# Altium PCB Mjollnir Prototype.PcbDoc (part 1 of 2)
Units mm, origin at the board's own origin, x right, y up, seen from the top; angles counter-clockwise.
Board outline 52 x 52 mm, 8 copper layers (S OT, G OU, S IU, G UD, G ID, S ID, G OD, S OD), stack 1.193 mm thick; 277 components, 187 nets, 947 pads, 173 vias.
Unrouted connection lines stored in the file: 461.
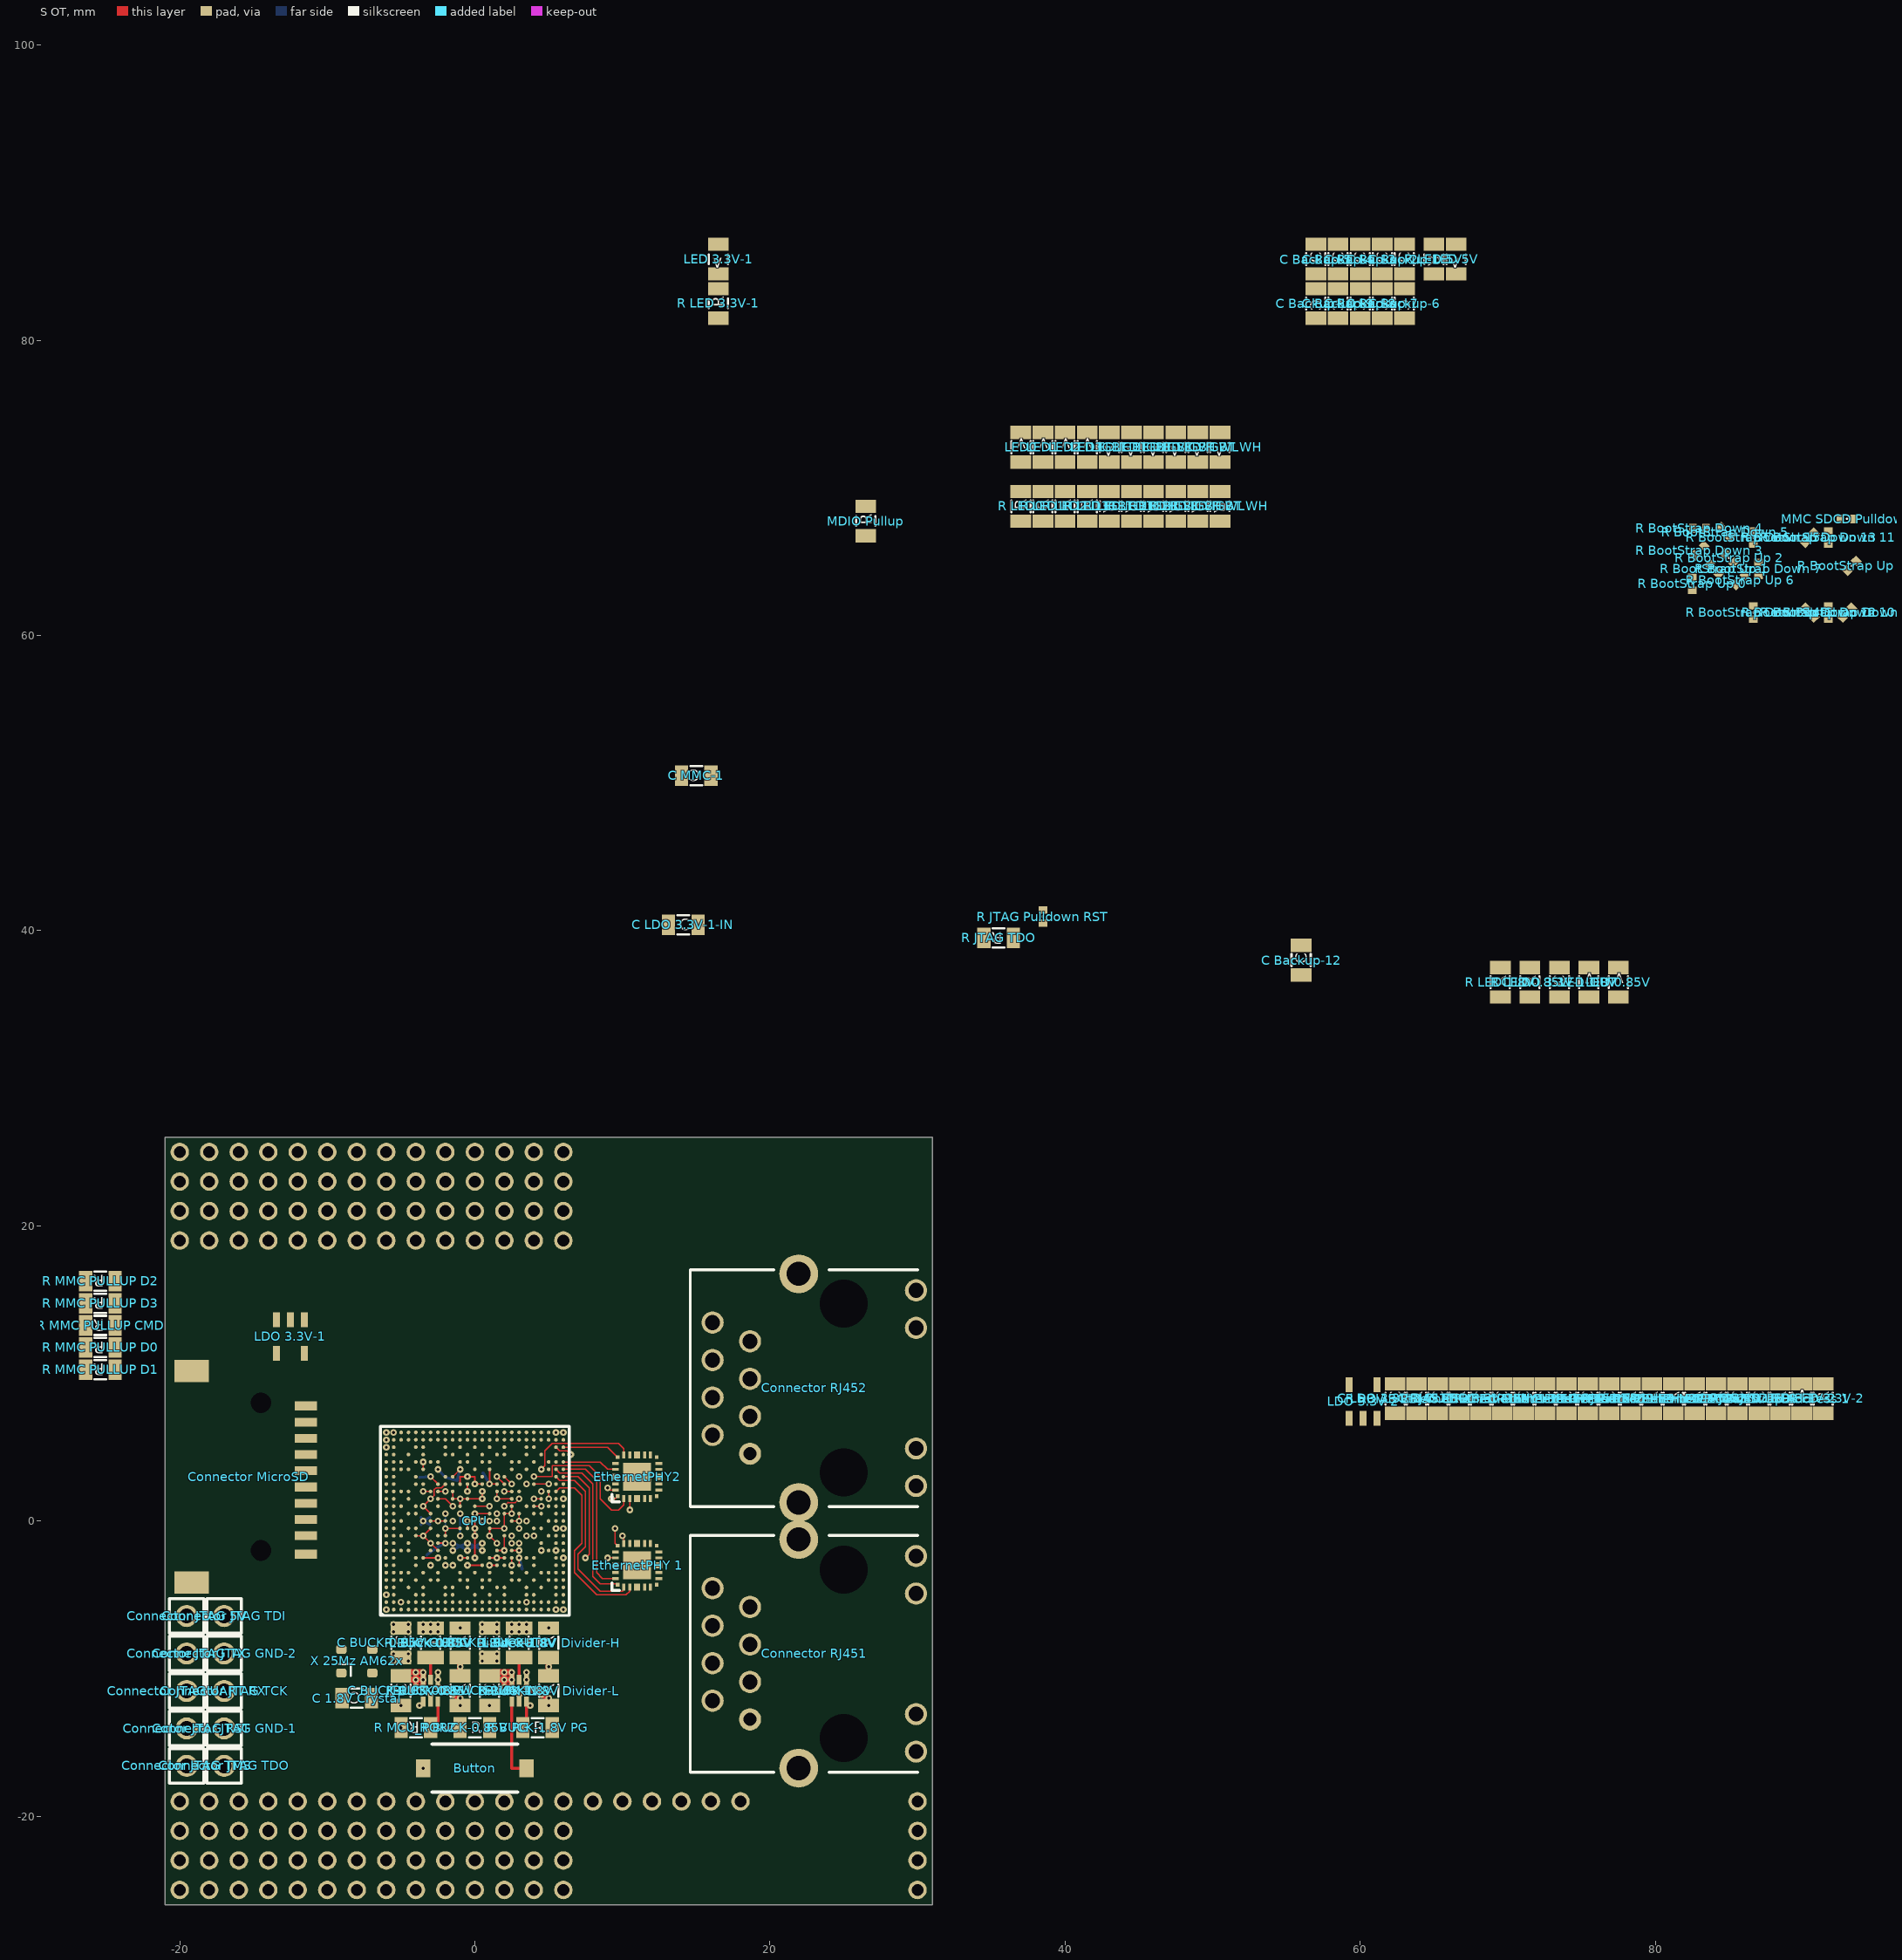
[diagram p0: S OT view]
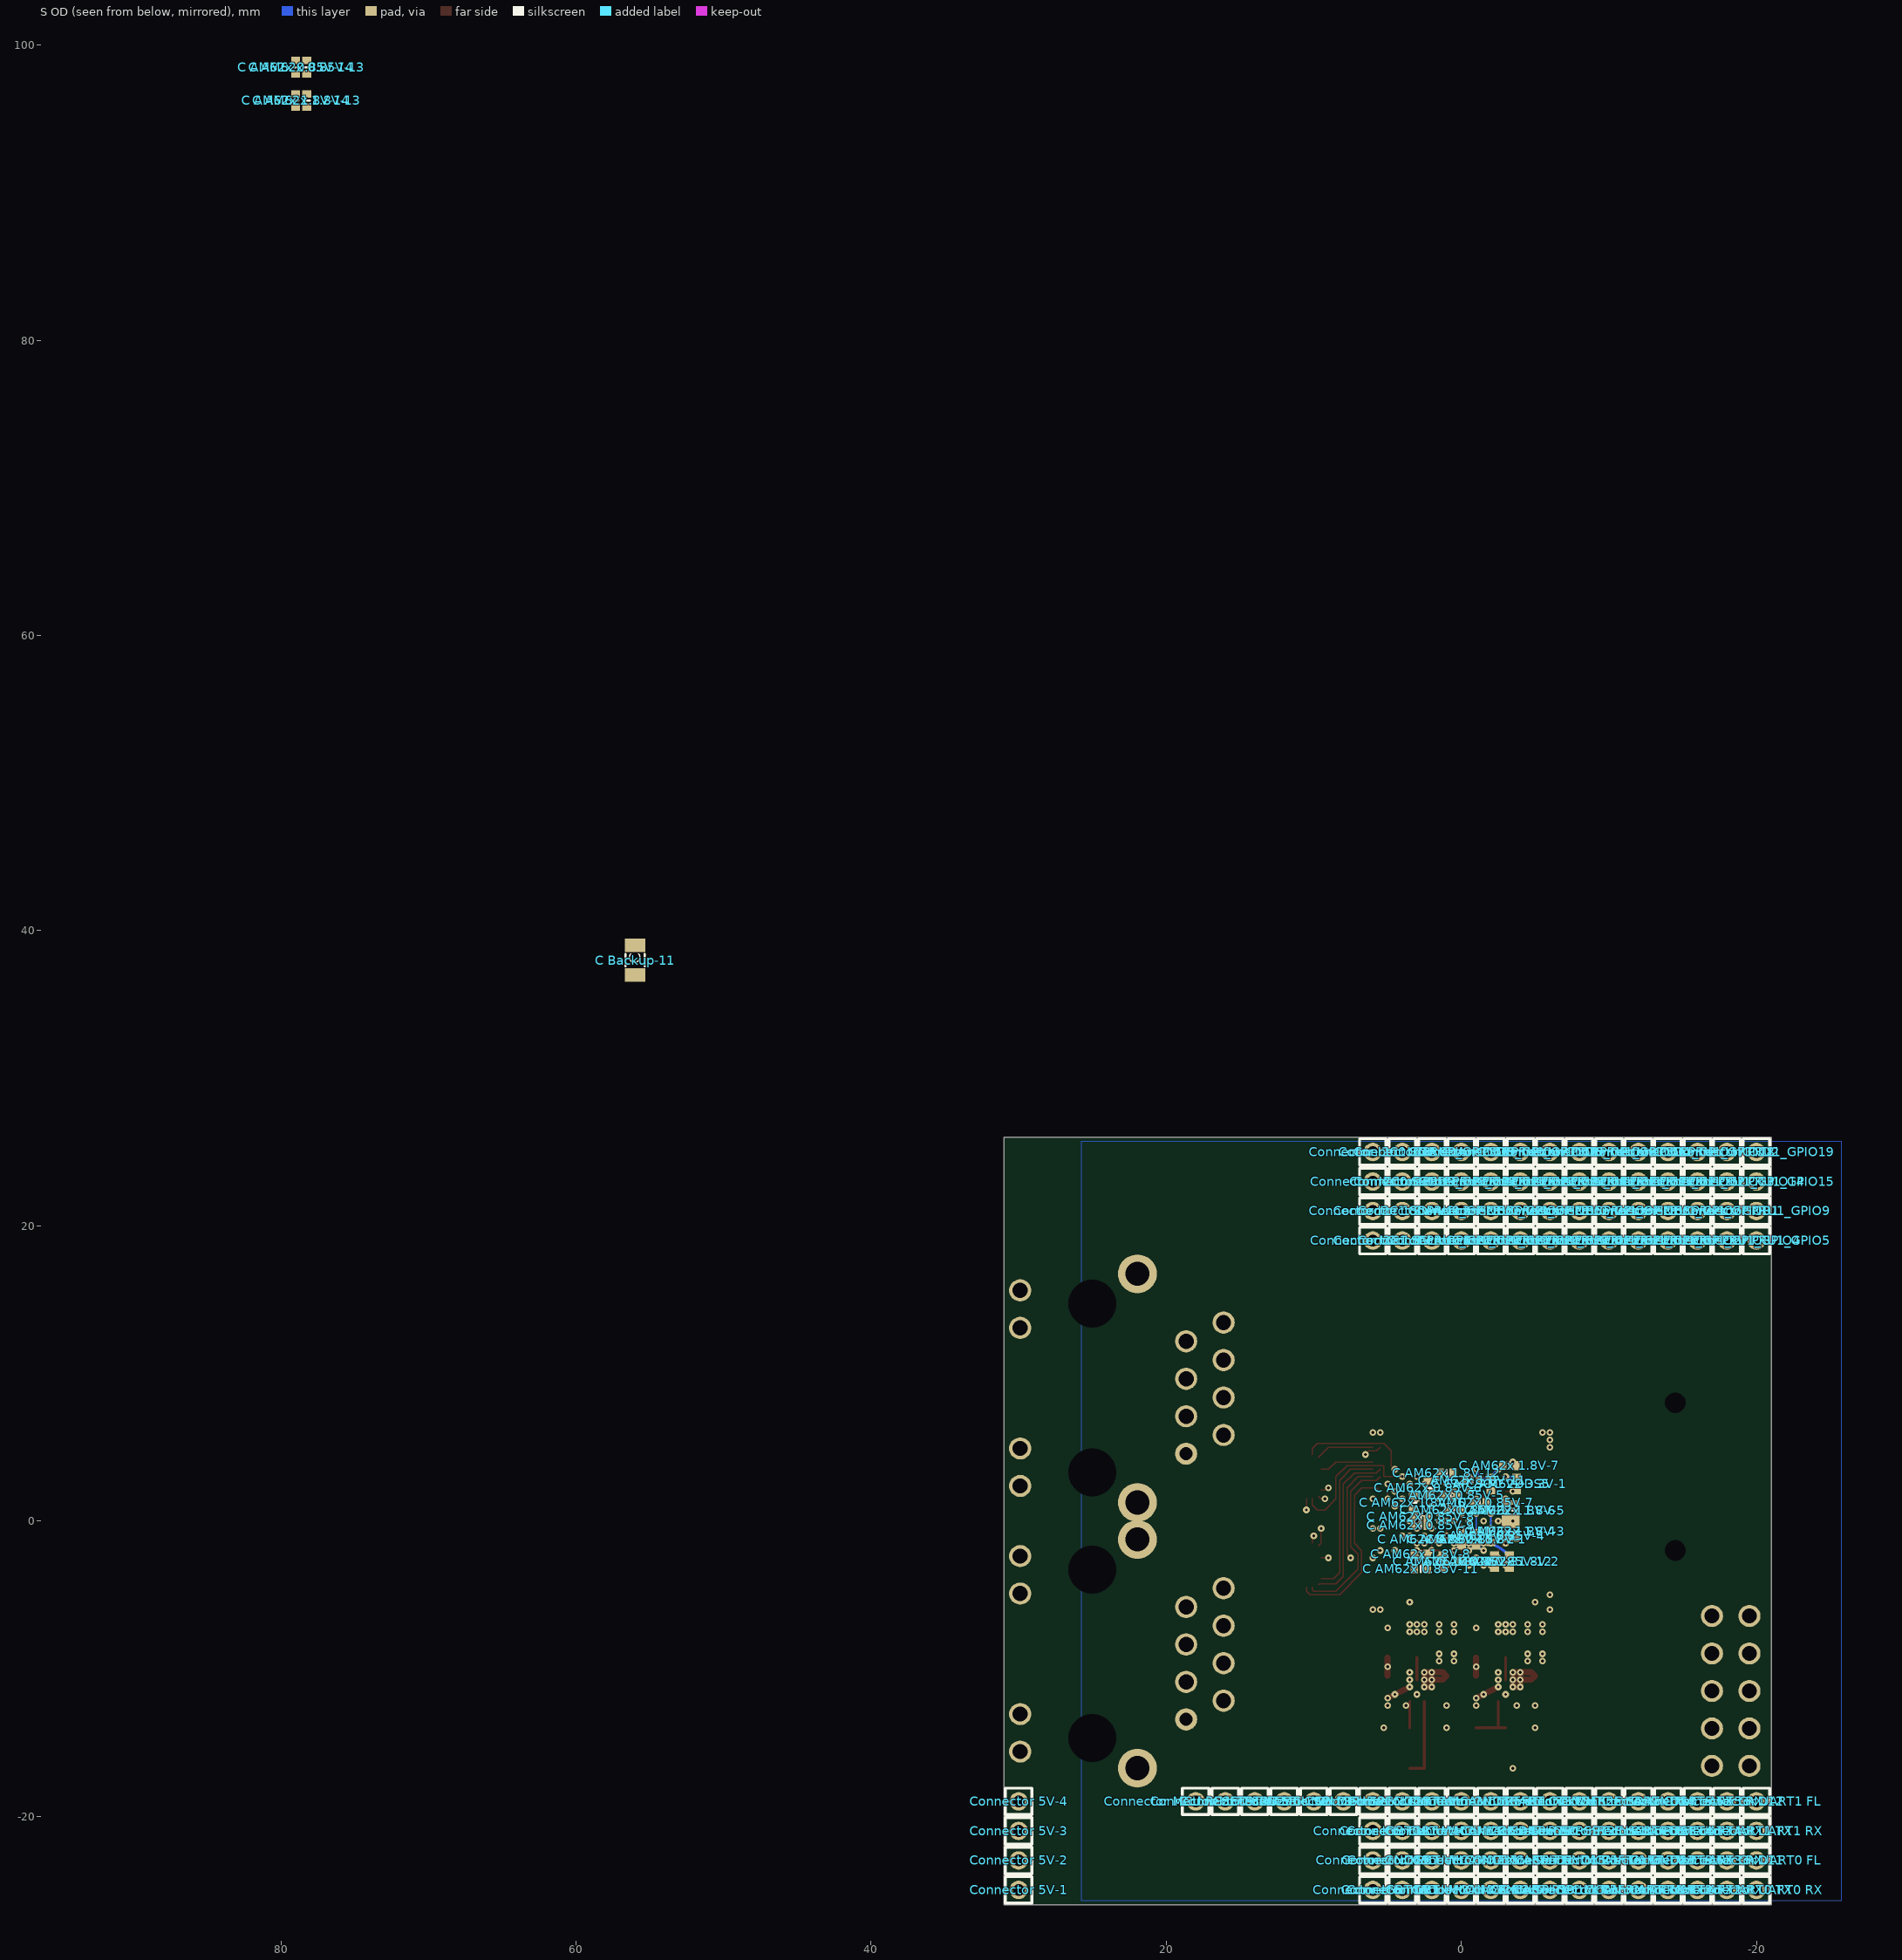
[diagram p1: S OD view, seen from below]
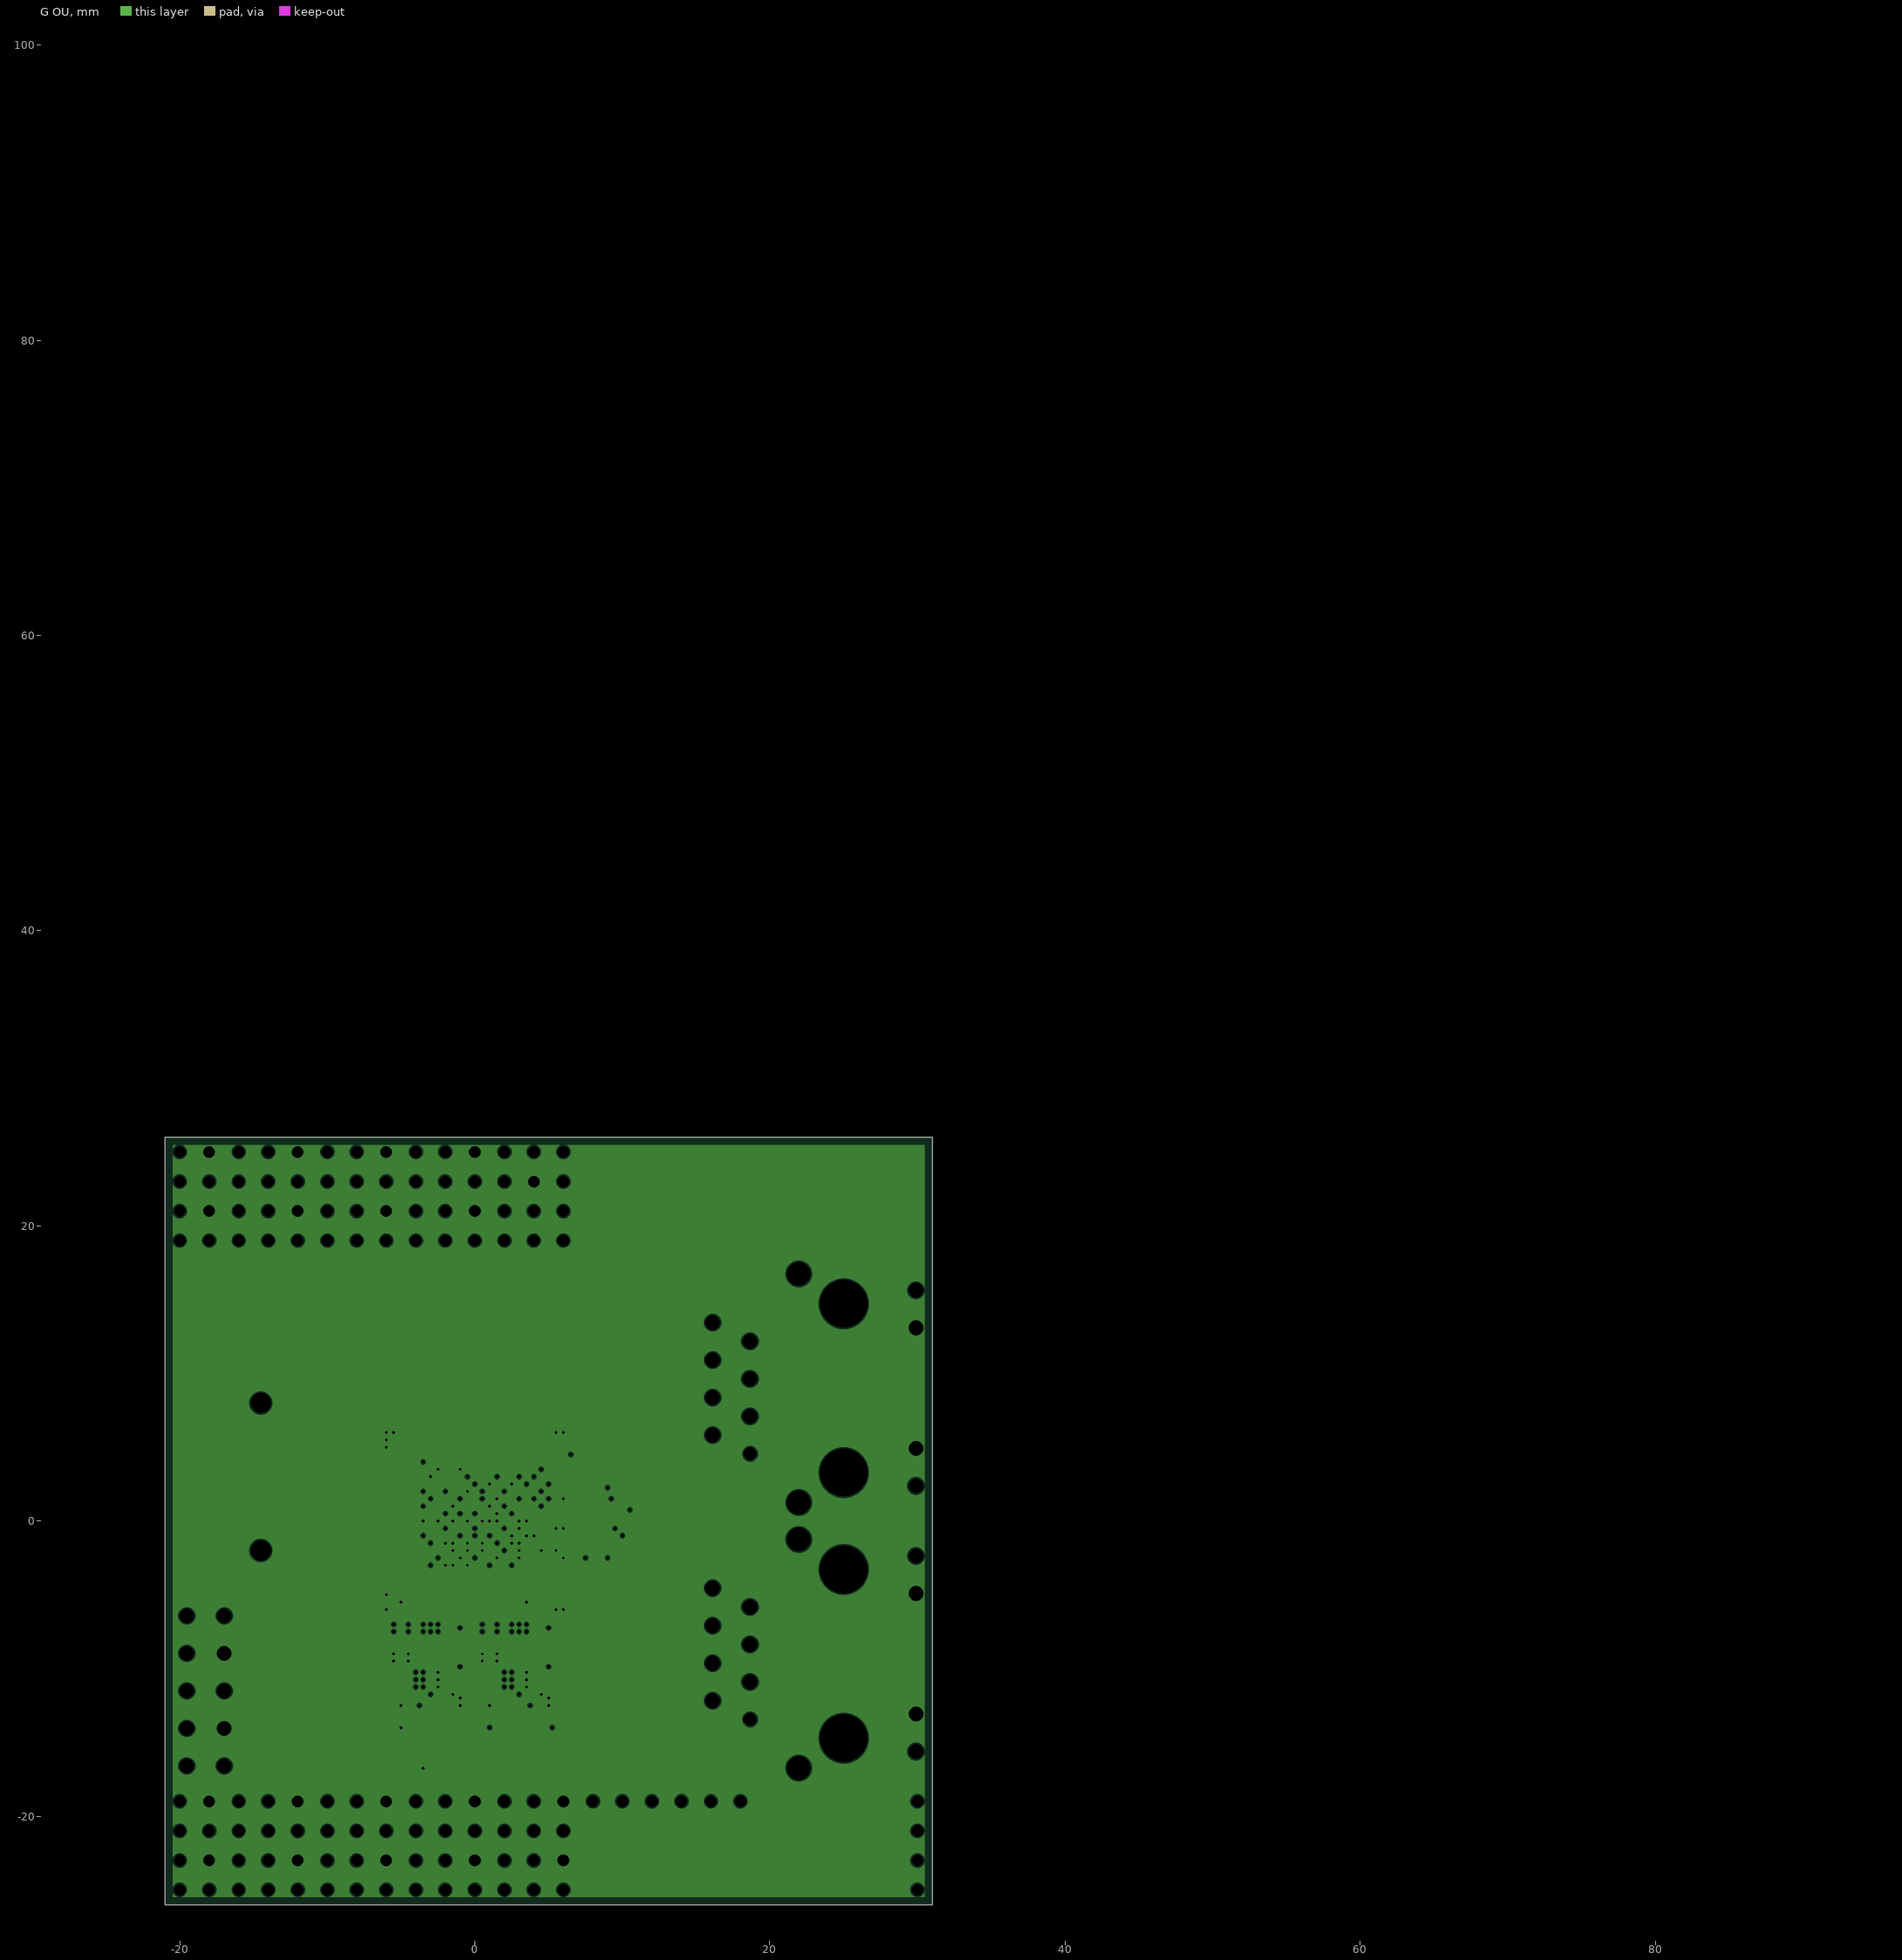
[diagram p2: G OU, clearances drawn from the general rule]
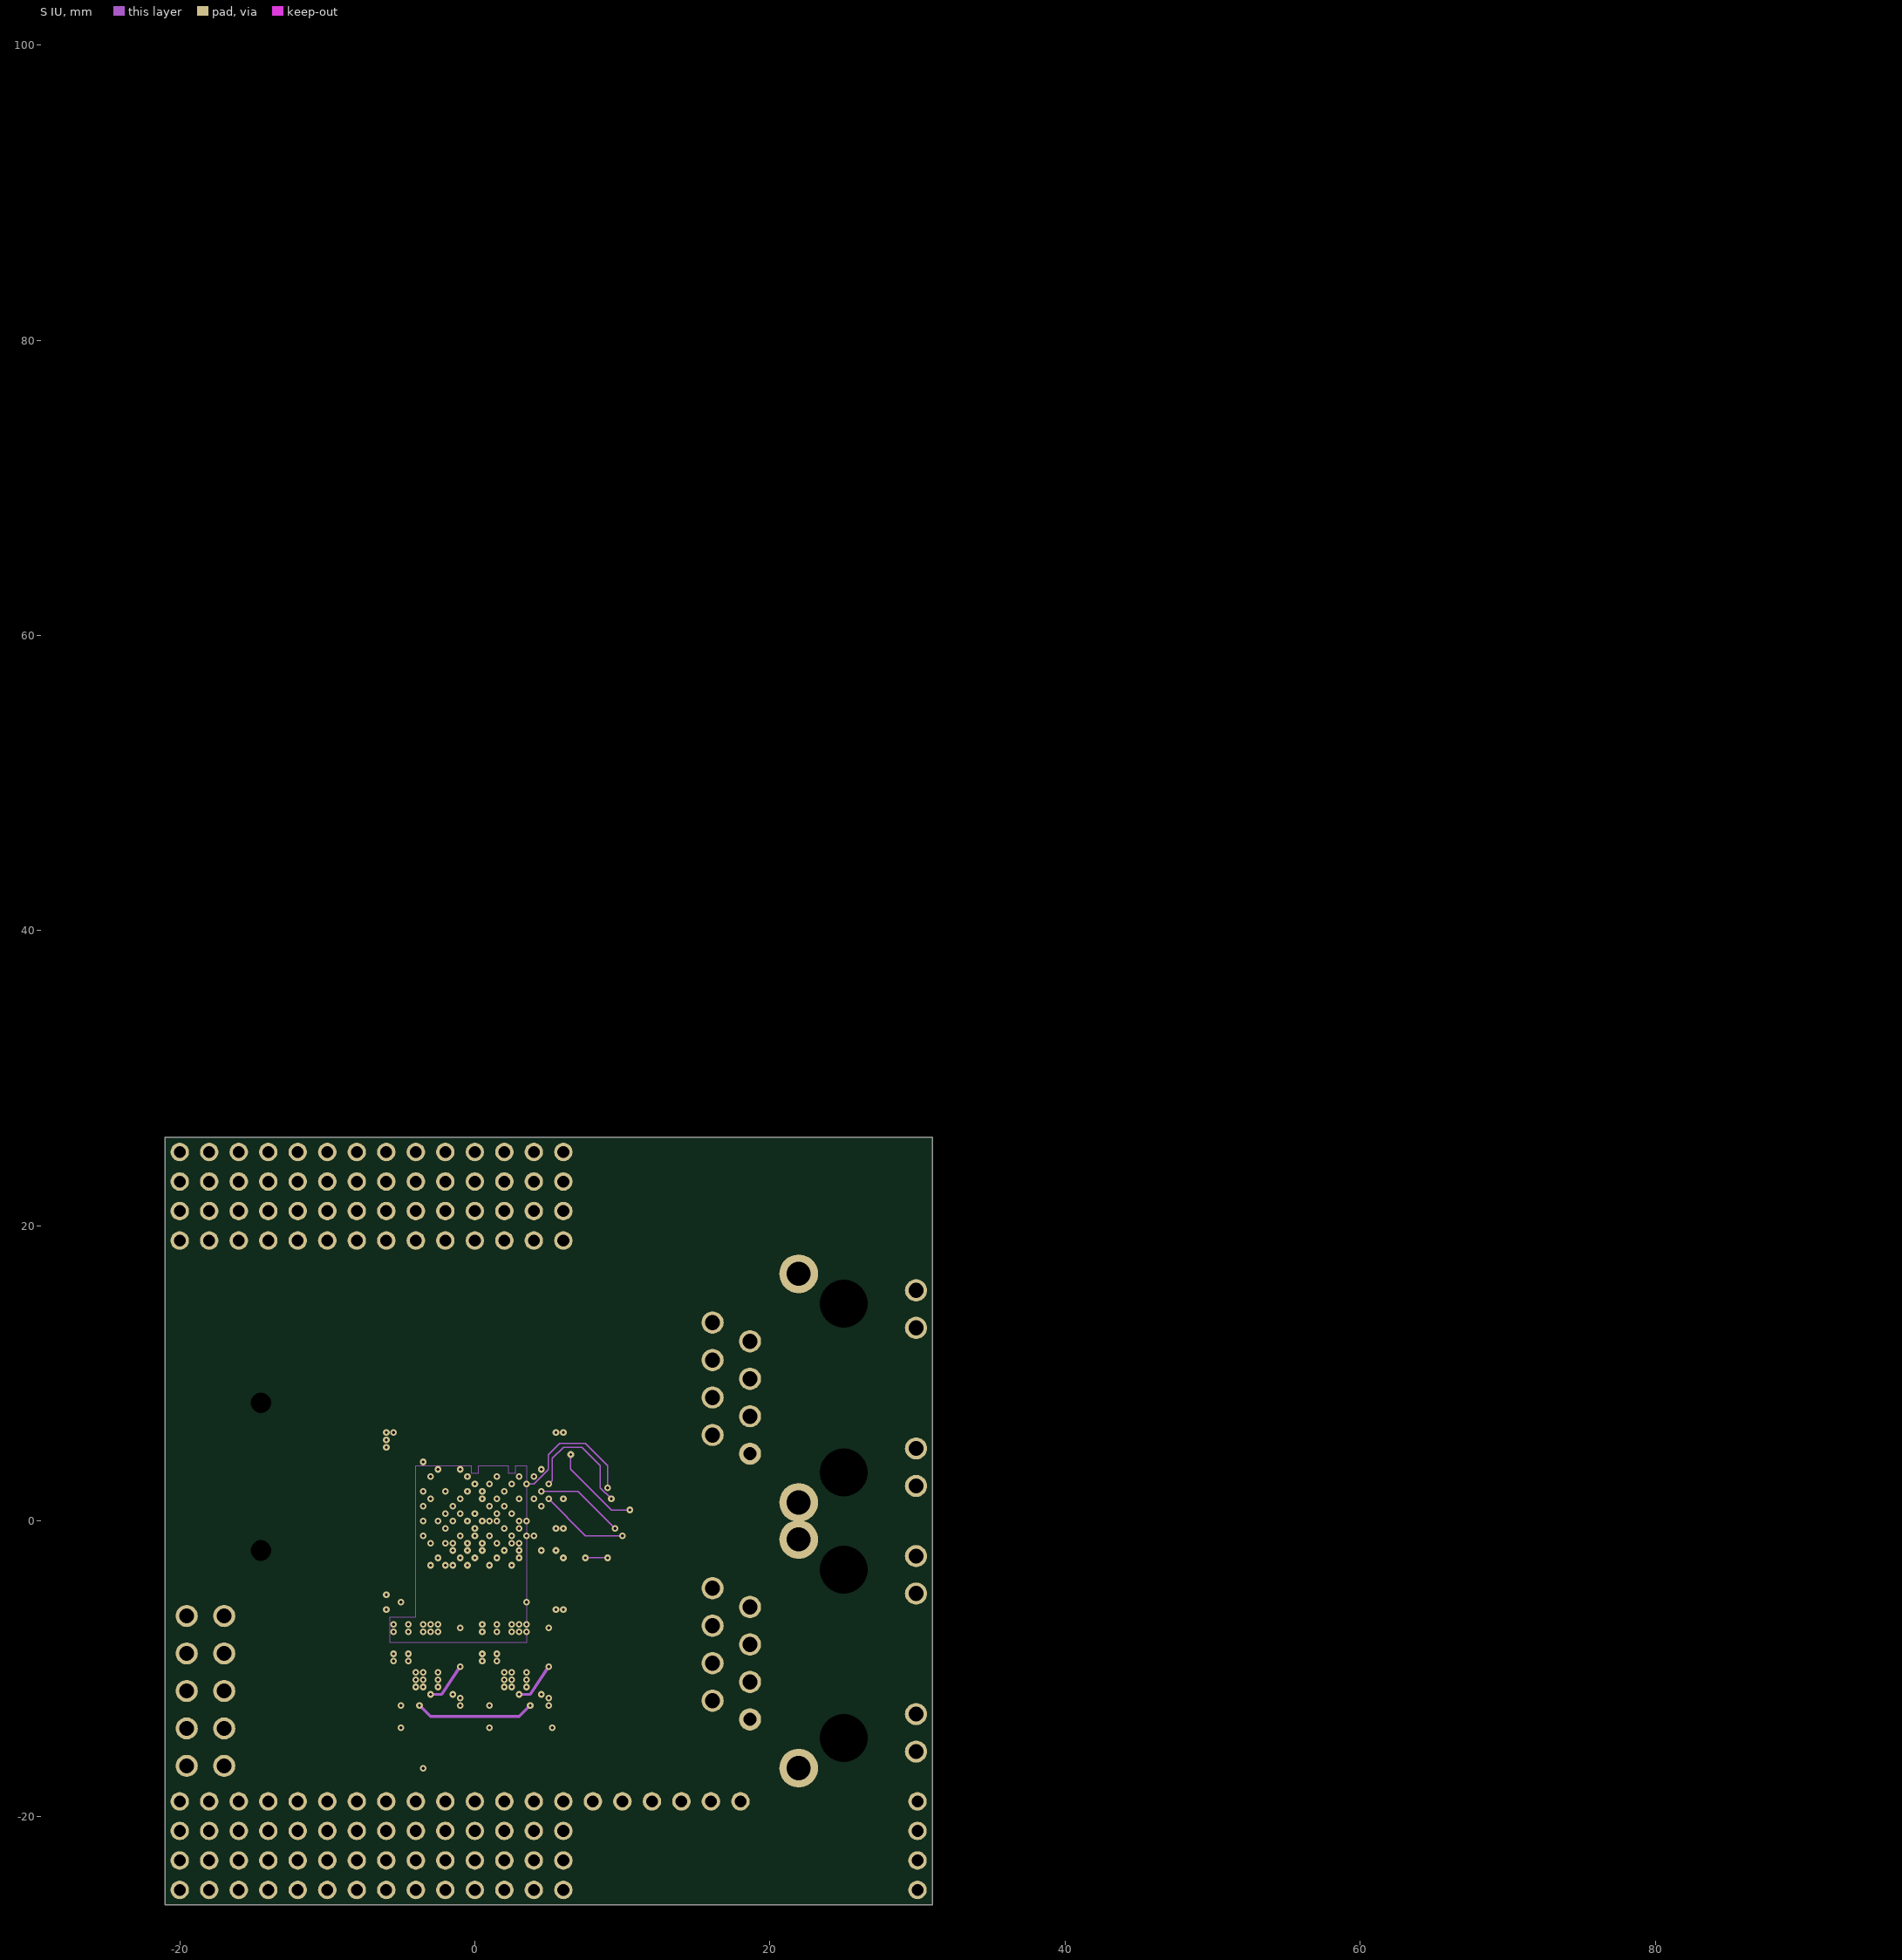
[diagram p3: S IU]
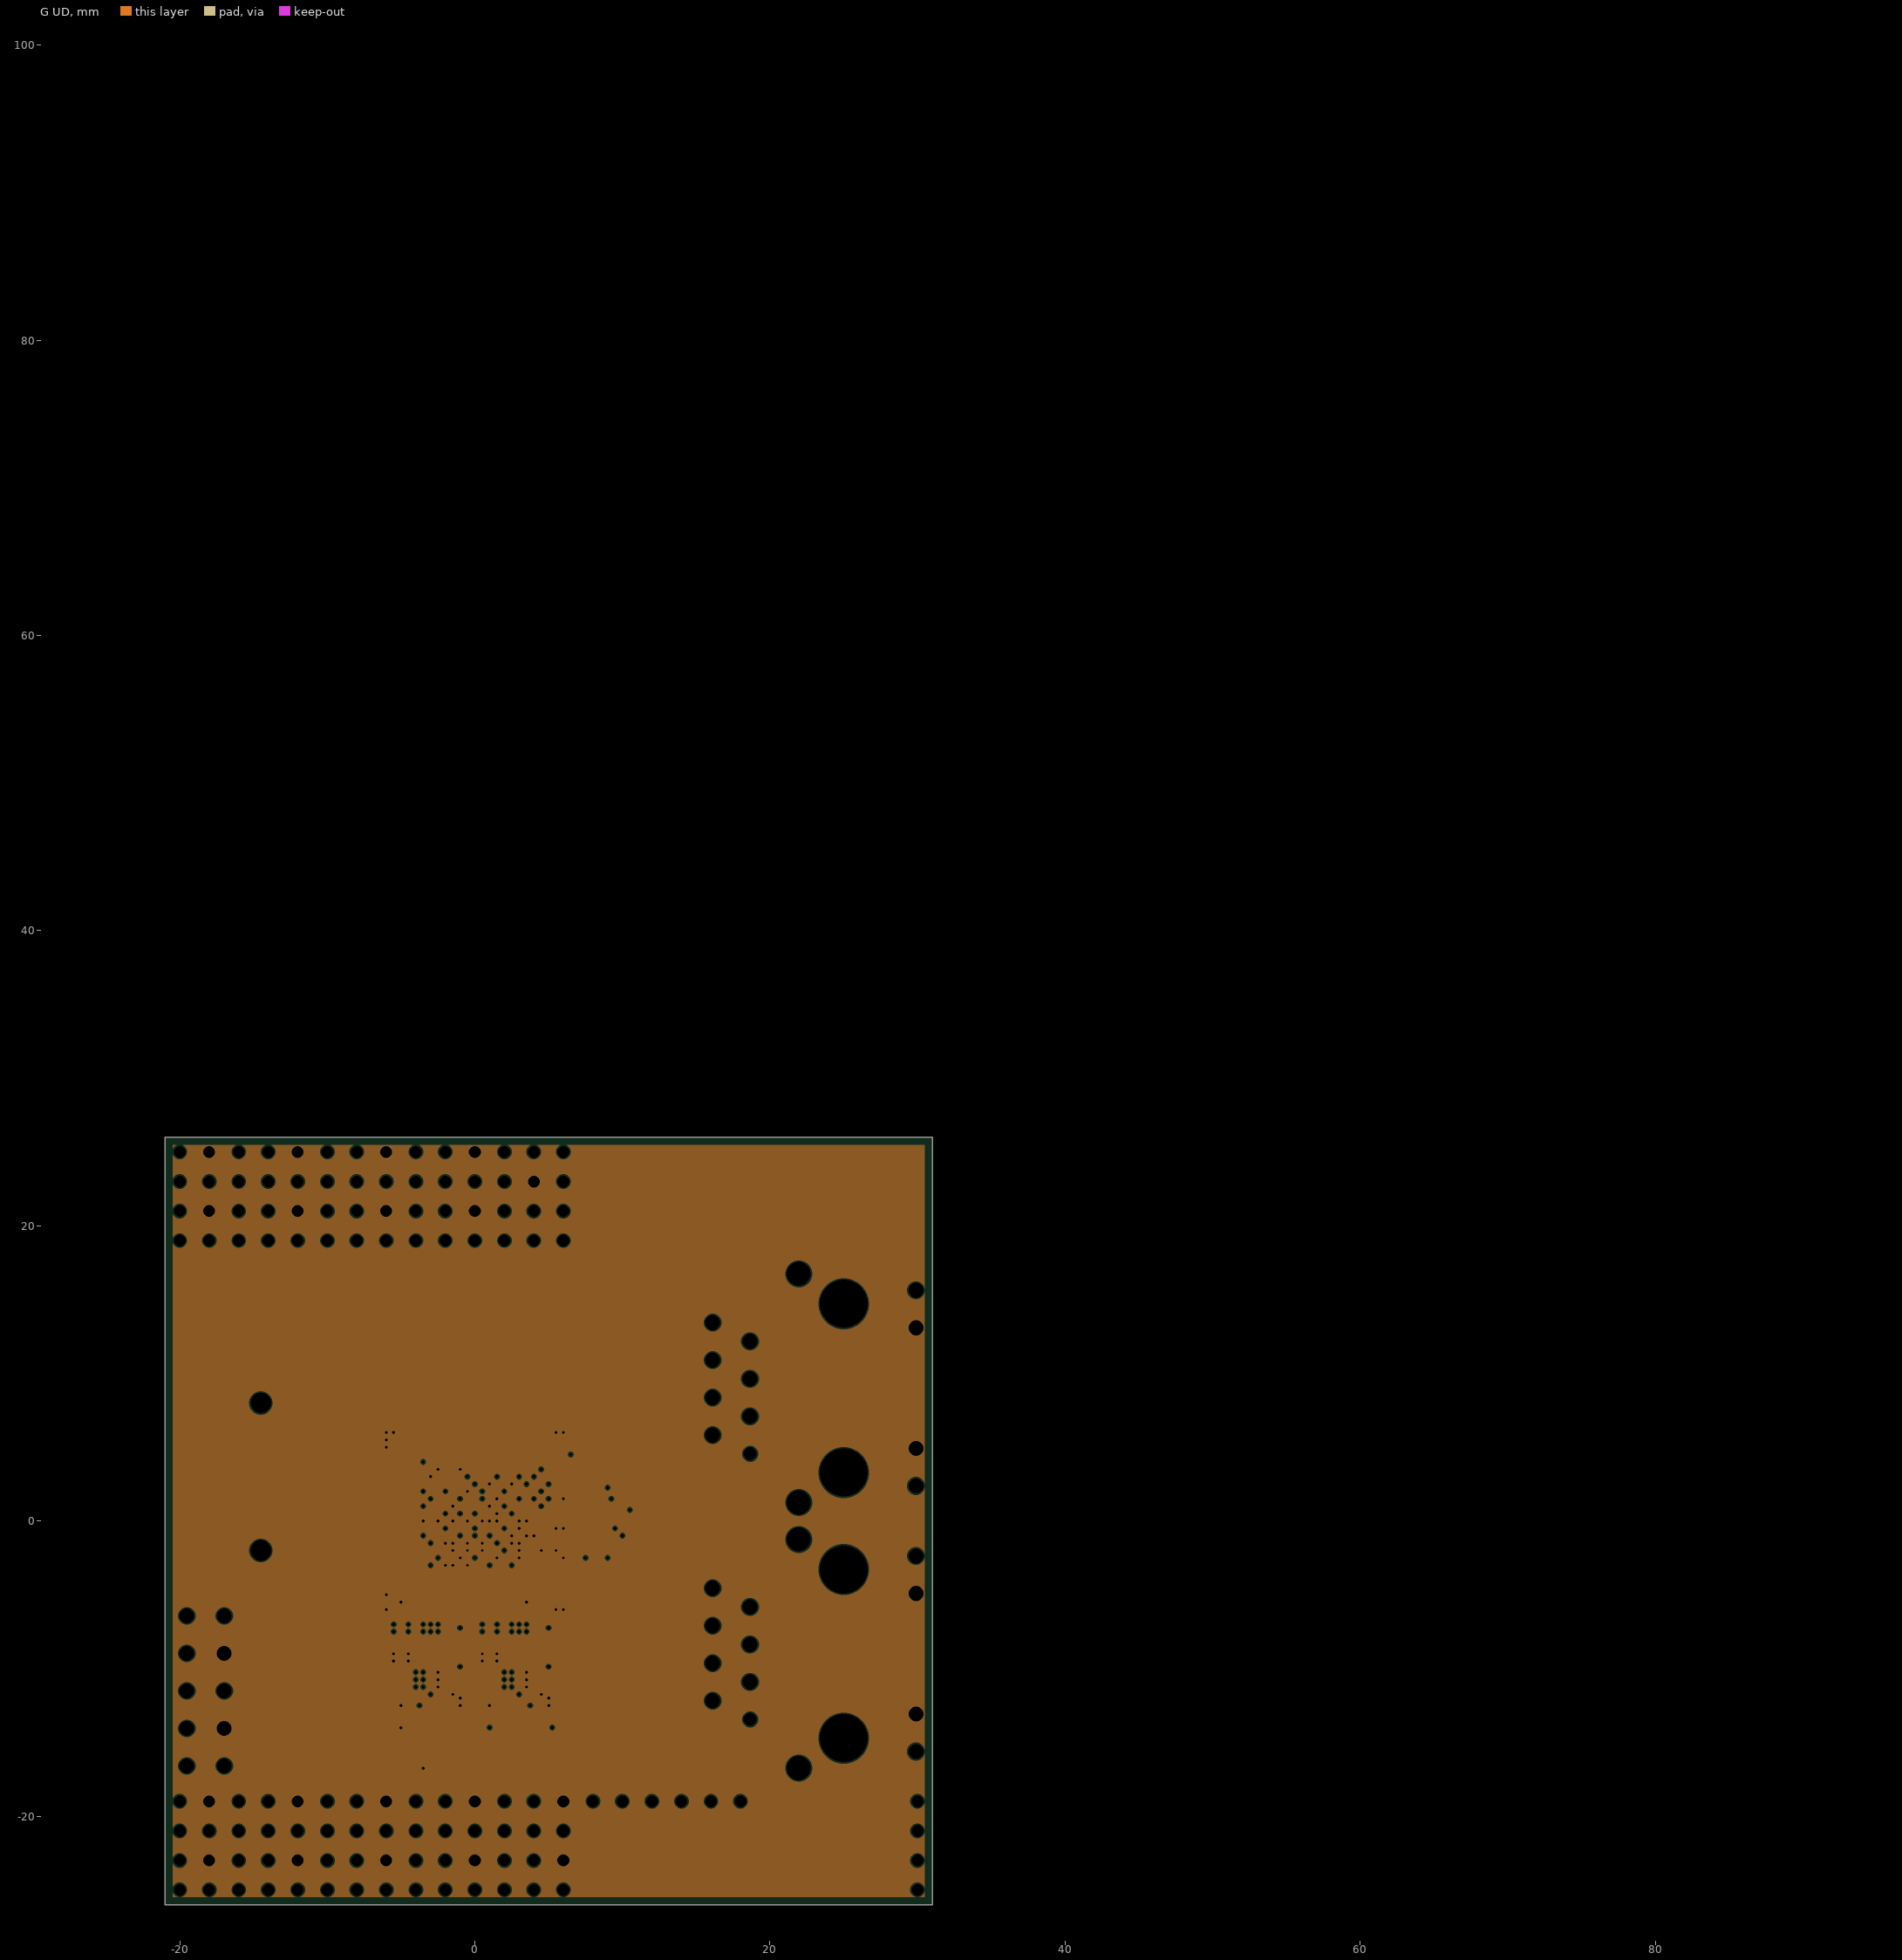
[diagram p4: G UD, clearances drawn from the general rule]
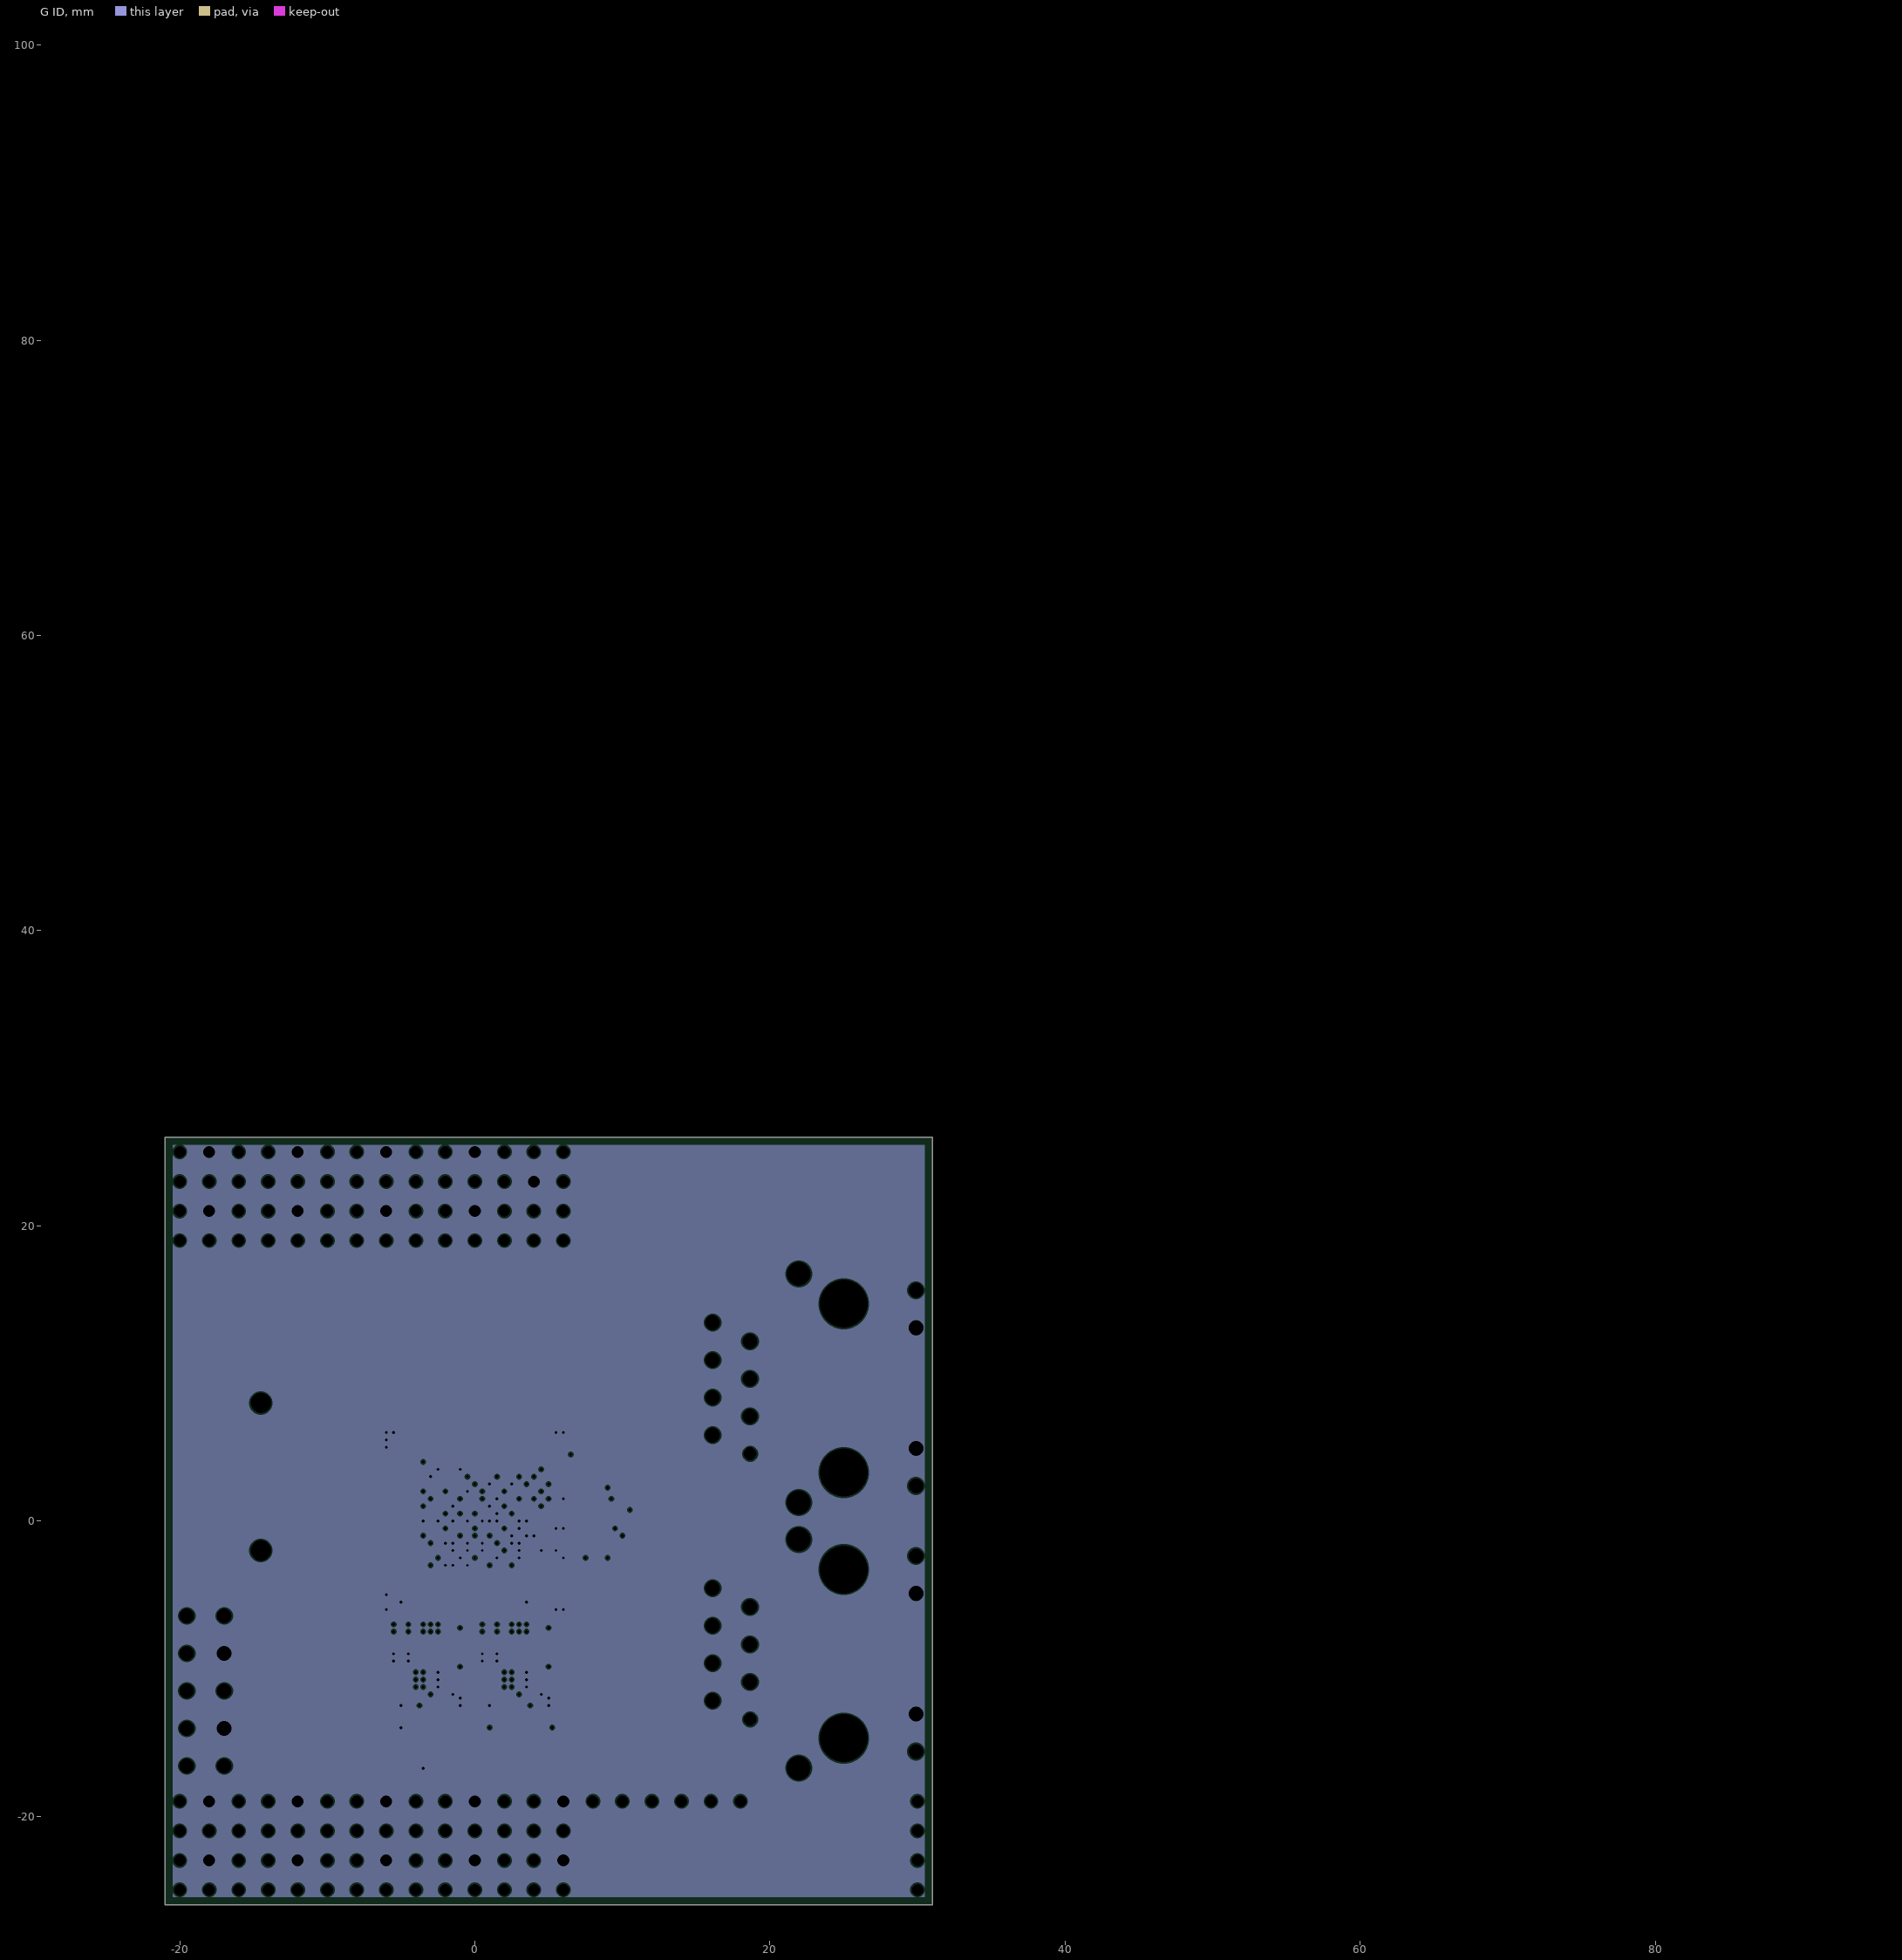
[diagram p5: G ID, clearances drawn from the general rule]
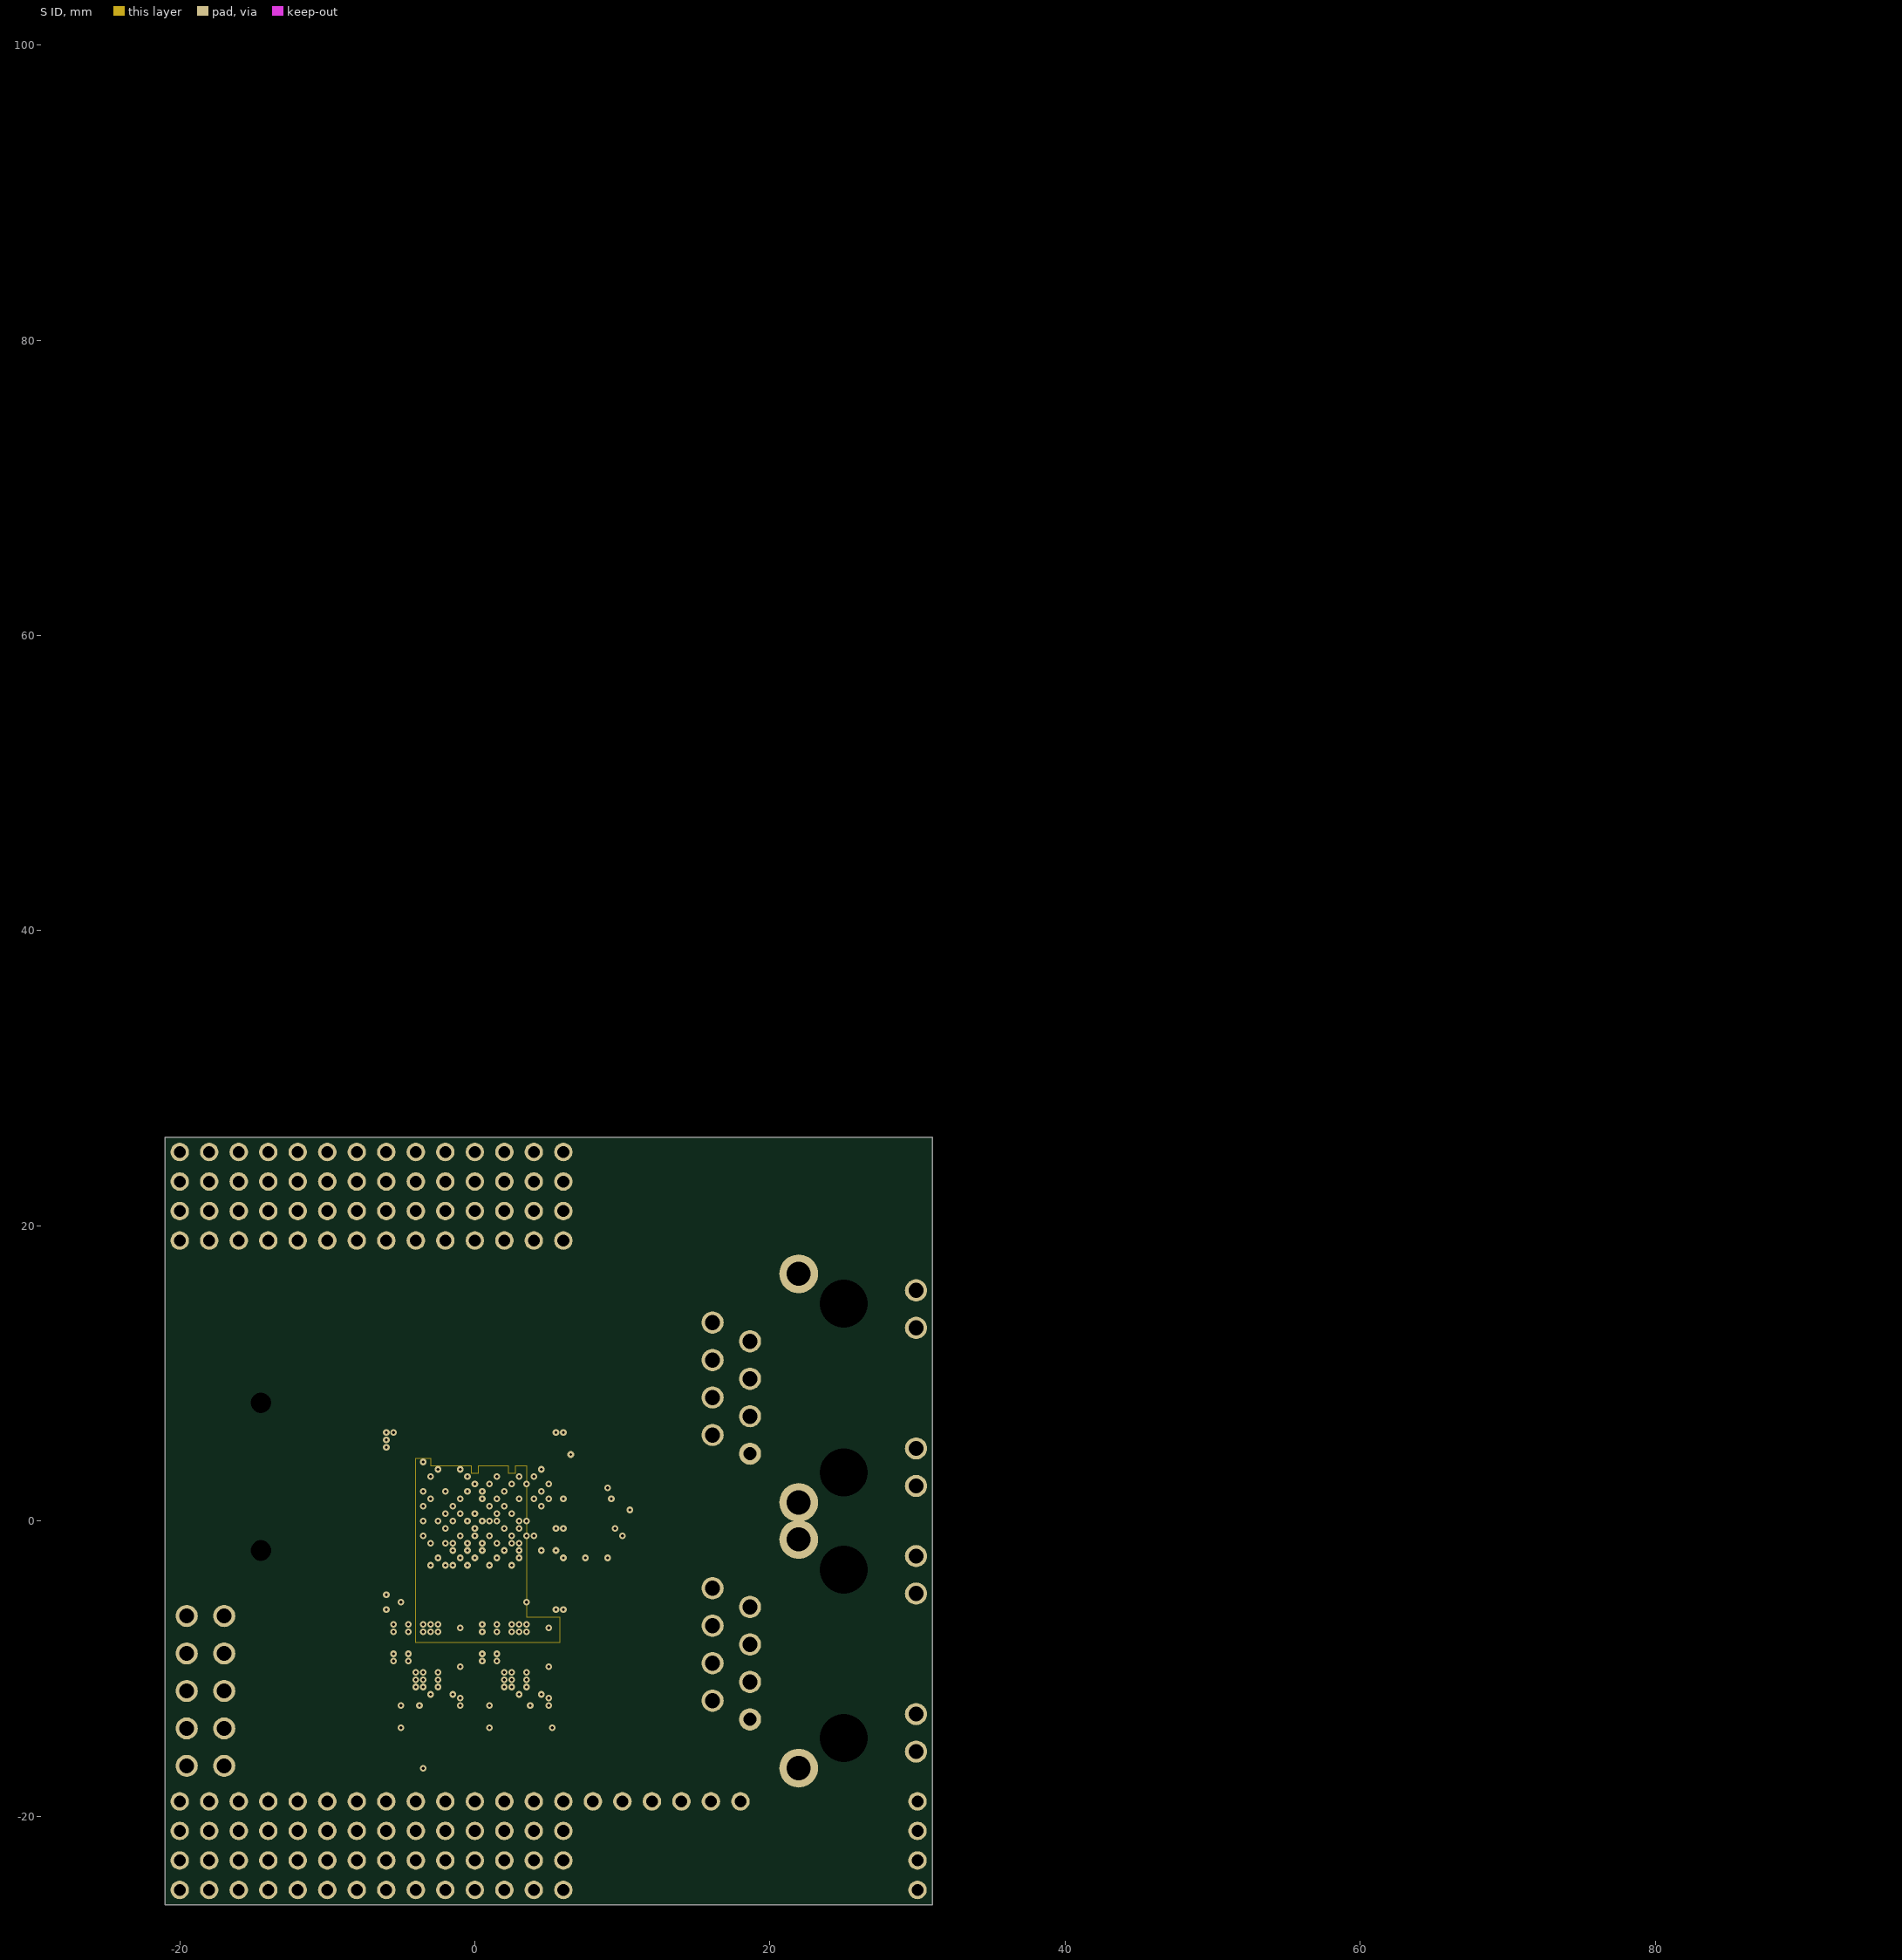
[diagram p6: S ID]
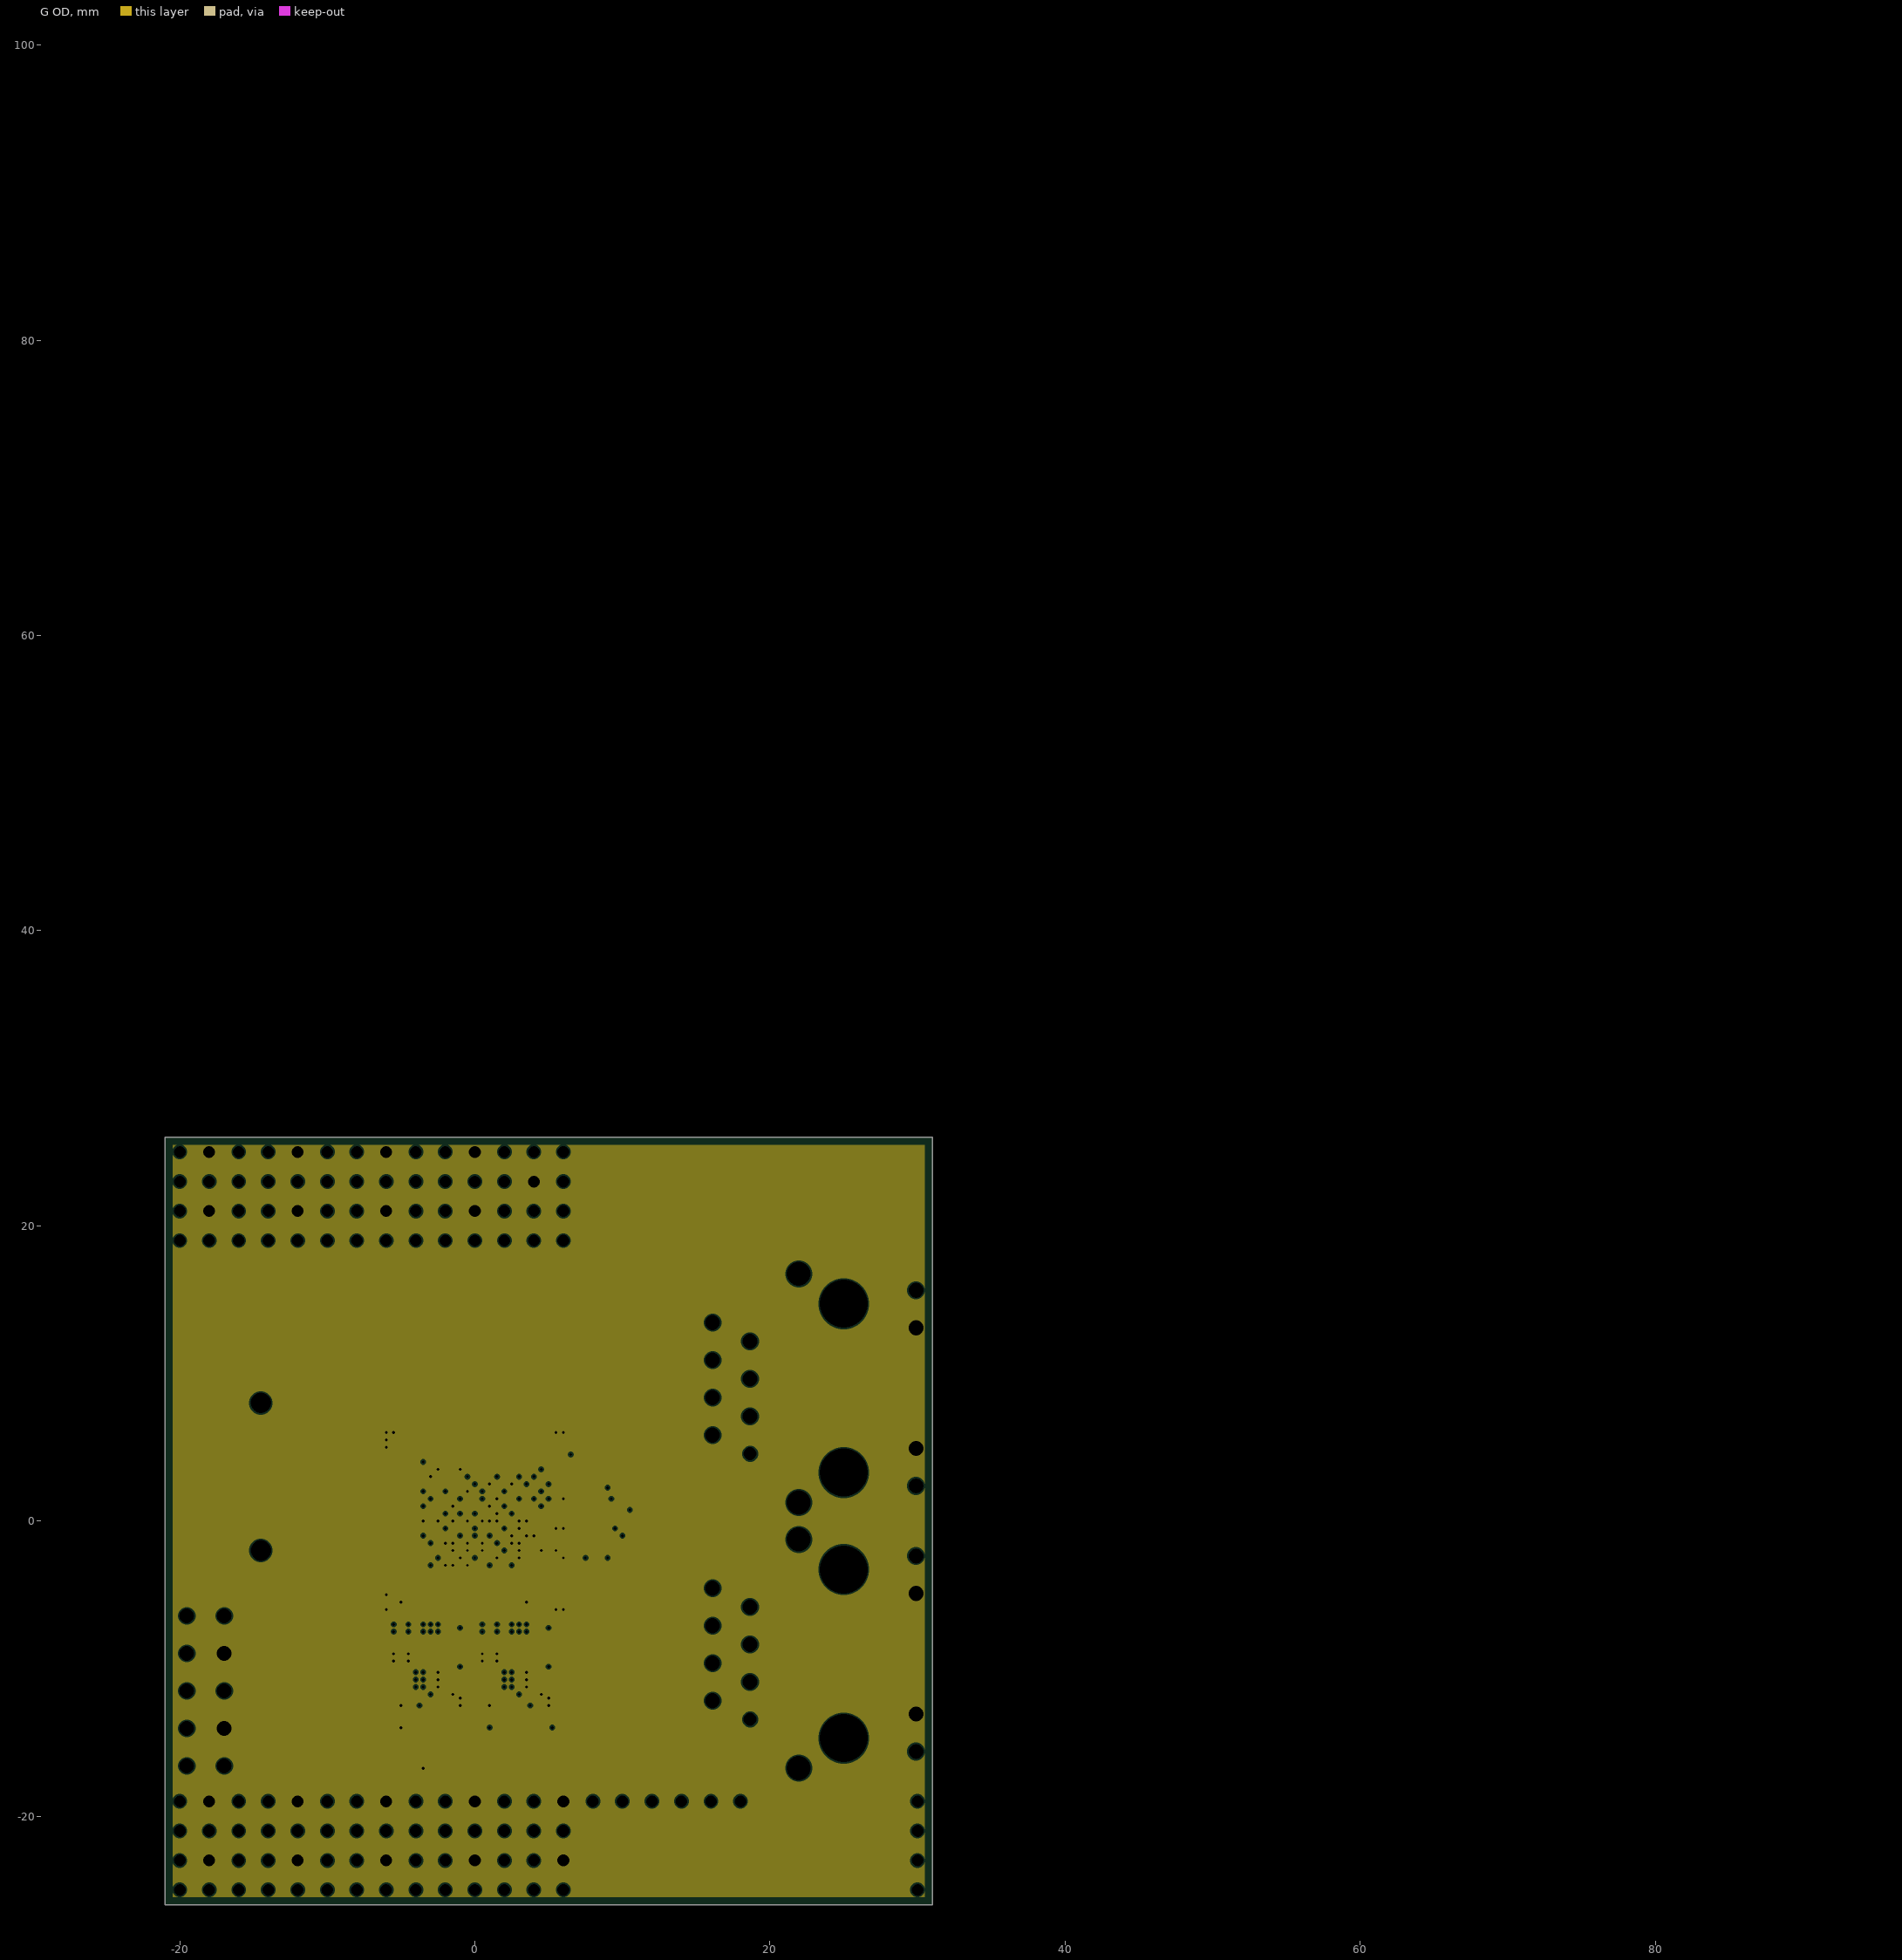
[diagram p7: G OD, clearances drawn from the general rule]

## Layer stack, top to bottom
Top Solder: solder mask 0.03, Solder Resist, Dk 3.8
S OT: signal copper 0.035
Prepreg 1/2: prepreg 0.0994, Prepreg, Dk 4.1
G OU: plane copper 0.0152, net GND
Core 2/3: core 0.2, Core, Dk 4.36
S IU: signal copper 0.0152
Prepreg 3/4: prepreg 0.1164, Prepreg, Dk 4.16
G UD: plane copper 0.0152, net GND
Core 4/5: core 0.2, Core, Dk 4.36
G ID: plane copper 0.0152, net GND
Prepreg 5/6: prepreg 0.1164, Prepreg, Dk 4.16
S ID: signal copper 0.0152
Core 6/7: core 0.2, Core, Dk 4.36
G OD: plane copper 0.0152, net GND
Prepreg 7/8: prepreg 0.0994, Prepreg, Dk 4.1
S OD: signal copper 0.035
Bottom Solder: solder mask 0.03, Solder Resist, Dk 3.8

## Board outline
-21,-26 -21,26 31,26 31,-26

## Design rules (kind name [scope] priority, off if disabled: settings)
AssemblyTestPointUsage [All] p1 off:
AssemblyTestpoint [All] p1 off: testpointundercomponent=TRUE minsize=1.016 maxsize=2.54 preferedsize=1.524 minholesize=0 maxholesize=1.016 preferedholesize=0.813 testpointgrid=0.025 usegrid=TRUE gridtolerance=0 allowsidetop=TRUE allowsidebottom=TRUE
BoardOutlineClearance [All] p1 off: gap=0.2 ignorepadtopadclearanceinfootprint=FALSE
Clearance [All] p1: gap=0.1 ignorepadtopadclearanceinfootprint=TRUE except(0.083: Arc-Arc Arc-Track Arc-SMDPad Arc-Via Track-Track Track-SMDPad Track-Via SMDPad-Via; 0.2: Arc-Text Arc-Hole Track-Text Track-Hole SMDPad-SMDPad SMDPad-THPad SMDPad-Text SMDPad-Hole THPad-THPad THPad-Via THPad-Text THPad-Hole Via-Text Via-Hole Fill-Text Fill-Hole Poly-Text Poly-Hole Region-Text Region-Hole Text-Text Text-Hole)
ComponentClearance [All] p1: gap=0 collisioncheckmode=3 verticalgap=2540 showdistances=FALSE
DiffPairsRouting DiffPairsRouting_MDI1 [InDifferentialPairClass('MDI1')] p1: maxlimit=0.155 minlimit=0.083 mostfreqgap=0.155 toplayer_maxgap=0.15 toplayer_prefgap=0.15 toplayer_minwidth=0.083 toplayer_maxwidth=0.1 toplayer_prefwidth=0.1 midlayer1_minwidth=0.083 midlayer1_maxwidth=0.095 midlayer1_prefwidth=0.095 midlayer5_minwidth=0.083 midlayer5_maxwidth=0.095 midlayer5_prefwidth=0.095 bottomlayer_maxgap=0.15 bottomlayer_prefgap=0.15 bottomlayer_minwidth=0.083 bottomlayer_maxwidth=0.1 bottomlayer_prefwidth=0.1 impedanceprofiledriven=TRUE impedanceprofileid={6EEADE6D-8A55-49AC-99A5-3DDE95CF3843} impedanceprofilevalue=100.000000 maxuncoupledlength=5
DiffPairsRouting DiffPairsRouting_MDI2 [InDifferentialPairClass('MDI2')] p2: maxlimit=0.155 minlimit=0.083 mostfreqgap=0.155 toplayer_maxgap=0.15 toplayer_prefgap=0.15 toplayer_minwidth=0.083 toplayer_maxwidth=0.1 toplayer_prefwidth=0.1 midlayer1_minwidth=0.083 midlayer1_maxwidth=0.095 midlayer1_prefwidth=0.095 midlayer5_minwidth=0.083 midlayer5_maxwidth=0.095 midlayer5_prefwidth=0.095 bottomlayer_maxgap=0.15 bottomlayer_prefgap=0.15 bottomlayer_minwidth=0.083 bottomlayer_maxwidth=0.1 bottomlayer_prefwidth=0.1 impedanceprofiledriven=TRUE impedanceprofileid={6EEADE6D-8A55-49AC-99A5-3DDE95CF3843} impedanceprofilevalue=100.000000 maxuncoupledlength=5
DiffPairsRouting DiffPairsRouting_USB0 [InDifferentialPairClass('USB0')] p3: maxlimit=0.135 minlimit=0.083 mostfreqgap=0.135 toplayer_maxgap=0.125 toplayer_prefgap=0.125 toplayer_minwidth=0.083 toplayer_maxwidth=0.125 toplayer_prefwidth=0.125 midlayer1_minwidth=0.083 midlayer1_maxwidth=0.115 midlayer1_prefwidth=0.115 midlayer5_minwidth=0.083 midlayer5_maxwidth=0.115 midlayer5_prefwidth=0.115 bottomlayer_maxgap=0.125 bottomlayer_prefgap=0.125 bottomlayer_minwidth=0.083 bottomlayer_maxwidth=0.125 bottomlayer_prefwidth=0.125 impedanceprofiledriven=TRUE impedanceprofileid={78CA06EB-8F70-4F0C-9483-7F94F6BBEE2C} impedanceprofilevalue=90.000000 maxuncoupledlength=5
DiffPairsRouting DiffPairsRouting_USB1 [InDifferentialPairClass('USB1')] p4: maxlimit=0.135 minlimit=0.083 mostfreqgap=0.135 toplayer_maxgap=0.125 toplayer_prefgap=0.125 toplayer_minwidth=0.083 toplayer_maxwidth=0.125 toplayer_prefwidth=0.125 midlayer1_minwidth=0.083 midlayer1_maxwidth=0.115 midlayer1_prefwidth=0.115 midlayer5_minwidth=0.083 midlayer5_maxwidth=0.115 midlayer5_prefwidth=0.115 bottomlayer_maxgap=0.125 bottomlayer_prefgap=0.125 bottomlayer_minwidth=0.083 bottomlayer_maxwidth=0.125 bottomlayer_prefwidth=0.125 impedanceprofiledriven=TRUE impedanceprofileid={78CA06EB-8F70-4F0C-9483-7F94F6BBEE2C} impedanceprofilevalue=90.000000 maxuncoupledlength=5
FabricationTestPointUsage [All] p1 off: valid=0 allowmultiple=FALSE
FabricationTestpoint [All] p1 off: side=3 testpointundercomponent=TRUE minsize=1.016 maxsize=2.54 preferedsize=1.524 minholesize=0 maxholesize=1.016 preferedholesize=0.813 testpointgrid=0.025 allowsidetop=TRUE allowsidebottom=TRUE usegrid=TRUE gridtolerance=0
HoleSize [All] p1: absolutevalues=TRUE maxlimit=5 minlimit=0.2 maxpercent=80.000 minpercent=20.000
HoleToHoleClearance [All] p1: gap=0.2 allowstackedmicrovias=TRUE
MinimumAnnularRing [All] p1: minimumring=0.05
MinimumSolderMaskSliver [All] p1 off: minsoldermaskwidth=0.1
NetAntennae [InNet('No Net')] p1: netantennaetolerance=0
PasteMaskExpansion [All] p1: expansion=-0.05
PlaneClearance [All] p1: clearance=0.1
PlaneConnect [All] p1: planeconnectstyle=Direct reliefexpansion=0.1 reliefentries=4 reliefconductorwidth=0.1 reliefairgap=0.1
PolygonConnect [All] p1: thpad.connectstyle=Relief thpad.reliefconductorwidth=0.1 thpad.reliefentries=4 thpad.polygonreliefangle="90 Angle" thpad.airgapwidth=0.083 smdpad.connectstyle=Relief smdpad.reliefconductorwidth=0.1 smdpad.reliefentries=4 smdpad.polygonreliefangle="90 Angle" smdpad.airgapwidth=0.083 via.connectstyle=Direct via.reliefconductorwidth=0.1 via.reliefentries=2 via.polygonreliefangle="90 Angle" via.airgapwidth=0.1
RoutingCorners [All] p1: cornerstyle=45-Degree minsetback=2 maxsetback=2
RoutingVias [All] p1: holewidth=0.2 width=0.45 viastyle="Through Hole" minholewidth=0.2 minwidth=0.45 maxholewidth=0.5 maxwidth=0.5
SilkToSilkClearance [All] p1 off: silktosilkclearance=0.1
SilkToSolderMaskClearance [IsPad] p1 off: minsilkscreentomaskgap=0.15 clearancetoexposedcopper=TRUE
SolderMaskExpansion [All] p1: expansion=0 istentingtop=FALSE
SupplyNets "Schematic Supply Nets_3" [InNet('3.3V-1')] p1: voltage=0.000
SupplyNets "Schematic Supply Nets_2" [InNet('3.3V-2')] p2: voltage=0.000
SupplyNets "Schematic Supply Nets_1" [InNet('EARTH')] p3: voltage=0.000
SupplyNets "Schematic Supply Nets_16" [InNet('3.3V')] p4: voltage=0.000
SupplyNets "Schematic Supply Nets_6" [InNet('GND')] p5: voltage=0.000
SupplyNets "Schematic Supply Nets" [InNet('5V')] p6: voltage=0.000
SupplyNets "Schematic Supply Nets_12" [InNet('1.8V')] p7: voltage=0.000
SupplyNets "Schematic Supply Nets_7" [InNet('0.85V')] p8: voltage=0.000
ViasUnderSMD [All] p1: allowed=TRUE
Width [Not(InNetClass('RMII1 RX') OR InNetClass('RMII2 RX') OR InNetClass('RMII1 TX') OR InNetClass('RMII2 TX') OR InNetClass('MMC'))] p1: maxlimit=0.5 minlimit=0.083 preferedwidth=0.1
Width Width_S50 [InNetClass('RMII1 RX') OR InNetClass('RMII2 RX') OR InNetClass('RMII1 TX') OR InNetClass('RMII2 TX') OR InNetClass('MMC')] p2: maxlimit=0.155 minlimit=0.083 preferedwidth=0.155 midlayer1_maxwidth=0.119 midlayer1_prefwidth=0.119 midlayer5_maxwidth=0.119 midlayer5_prefwidth=0.119 impedanceprofiledriven=TRUE impedanceprofileid={A8C0CB3F-92D4-4D26-8D92-DE4ED55EE8A1} impedanceprofilevalue=50.000000 minimp=50.000000 maximp=50.000000 favimp=50.000000
14 further rules are at their usual default settings.

## Classes and differential pairs
differential pair class MDI2: "Ethernet2 RD" "Ethernet2 TD"
differential pair class MDI1: "Ethernet1 RD" "Ethernet1 TD"
net class "RMII2 TX": "RMII2 CLK" "RMII2 TX_D0" "RMII2 TX_D1" "RMII2 TX_EN"
net class "RMII2 RX": "RMII2 CLK" "RMII2 CRS_DV" "RMII2 RX_D0" "RMII2 RX_D1"
net class "RMII1 TX": "RMII1 CLK" "RMII1 TX_D0" "RMII1 TX_D1" "RMII1 TX_EN"
net class "RMII1 RX": "RMII1 CLK" "RMII1 CRS_DV" "RMII1 RX_D0" "RMII1 RX_D1"
net class MMC: MMC_CLK MMC_CMD MMC_D0 MMC_D1 MMC_D2 MMC_D3
differential pair "Ethernet2 TD": +"Ethernet2 TD_P" -"Ethernet2 TD_N"
differential pair "Ethernet2 RD": +"Ethernet2 RD_P" -"Ethernet2 RD_N"
differential pair "Ethernet1 TD": +"Ethernet1 TD_P" -"Ethernet1 TD_N"
differential pair "Ethernet1 RD": +"Ethernet1 RD_P" -"Ethernet1 RD_N"

## Components (designator, comment, footprint, x,y, rotation, side; value= is the part's Value field where it differs from the comment)
"BUCK 0.85V" "TLV62585PDRL" TPS62A03ADLR -3,-11.5 r270 top
"BUCK 1.8V" "TLV62585PDRL" TPS62A03ADLR 3,-11.5 r270 top
Button "Button" "PUSHBUTTON TSB008A25" 0,-16.75 r180 top
"C 1.8V Crystal" "1uF" "CAPACITOR 2012(0805)" -8,-12 r180 top
"C AM62x 0.85V-1" "0.1uF" "CAPACITOR 1005(0402)" 0.5,0.75 r180 bottom
"C AM62x 0.85V-2" "0.1uF" "CAPACITOR 1005(0402)" 0,-1.25 r90 bottom
"C AM62x 0.85V-3" "0.1uF" "CAPACITOR 1005(0402)" -0.25,-2.75 r0 bottom
"C AM62x 0.85V-4" "0.1uF" "CAPACITOR 1005(0402)" -2,-1 r90 bottom
"C AM62x 0.85V-5" "0.1uF" "CAPACITOR 1005(0402)" 0.75,1.75 r180 bottom
"C AM62x 0.85V-6" "0.1uF" "CAPACITOR 1005(0402)" 2.25,2.25 r270 bottom
"C AM62x 0.85V-7" "0.1uF" "CAPACITOR 1005(0402)" -1.25,1.25 r0 bottom
"C AM62x 0.85V-8" "0.1uF" "CAPACITOR 1005(0402)" 2.75,0.3 r180 bottom
"C AM62x 0.85V-9" "0.1uF" "CAPACITOR 1005(0402)" 2.75,-0.3 r180 bottom
"C AM62x 0.85V-10" "0.1uF" "CAPACITOR 1005(0402)" 1.75,-1.25 r180 bottom
"C AM62x 0.85V-11" "0.1uF" "CAPACITOR 1005(0402)" 2.75,-3.25 r180 bottom
"C AM62x 0.85V-12" "0.1uF" "CAPACITOR 1005(0402)" -2.25,-2.75 r90 bottom
"C AM62x 0.85V-13" "0.1uF" "CAPACITOR 1005(0402)" 78.25,98.5 r90 bottom
"C AM62x 0.85V-14" "0.1uF" "CAPACITOR 1005(0402)" 79,98.5 r90 bottom
"C AM62x 1.8V-1" "0.1uF" "CAPACITOR 1005(0402)" -1,-1.25 r90 bottom
"C AM62x 1.8V-2" "0.1uF" "CAPACITOR 1005(0402)" -3.25,-2.75 r270 bottom
"C AM62x 1.8V-3" "0.1uF" "CAPACITOR 1005(0402)" -3.65,-0.7 r270 bottom
"C AM62x 1.8V-4" "0.1uF" "CAPACITOR 1005(0402)" -3.05,-0.7 r270 bottom
"C AM62x 1.8V-5" "0.1uF" "CAPACITOR 1005(0402)" -3.65,0.7 r90 bottom
"C AM62x 1.8V-6" "0.1uF" "CAPACITOR 1005(0402)" -3.05,0.7 r90 bottom
"C AM62x 1.8V-7" "0.1uF" "CAPACITOR 1005(0402)" -3.25,3.75 r180 bottom
"C AM62x 1.8V-8" "0.1uF" "CAPACITOR 1005(0402)" 2.75,-2.25 r180 bottom
"C AM62x 1.8V-9" "0.1uF" "CAPACITOR 1005(0402)" 1.25,-2.75 r270 bottom
"C AM62x 1.8V-10" "0.1uF" "CAPACITOR 1005(0402)" 3.25,1.25 r90 bottom
"C AM62x 1.8V-11" "0.1uF" "CAPACITOR 1005(0402)" -0.75,2.75 r0 bottom
"C AM62x 1.8V-12" "0.1uF" "CAPACITOR 1005(0402)" 1,3.25 r0 bottom
"C AM62x 1.8V-13" "0.1uF" "CAPACITOR 1005(0402)" 78.25,96.25 r90 bottom
"C AM62x 1.8V-14" "0.1uF" "CAPACITOR 1005(0402)" 79,96.25 r90 bottom
"C AM62x 3.3V-1" "0.1uF" "CAPACITOR 1005(0402)" -3.75,2.5 r270 bottom
"C Backup-1" "22uF" "CAPACITOR 2012(0805)" 63,85.5 r90 top
"C Backup-2" "22uF" "CAPACITOR 2012(0805)" 61.5,85.5 r90 top
"C Backup-3" "22uF" "CAPACITOR 2012(0805)" 60,85.5 r90 top
"C Backup-4" "22uF" "CAPACITOR 2012(0805)" 58.5,85.5 r90 top
"C Backup-5" "22uF" "CAPACITOR 2012(0805)" 57,85.5 r90 top
"C Backup-6" "22uF" "CAPACITOR 2012(0805)" 63,82.5 r270 top
"C Backup-7" "22uF" "CAPACITOR 2012(0805)" 61.5,82.5 r270 top
"C Backup-8" "22uF" "CAPACITOR 2012(0805)" 60,82.5 r270 top
"C Backup-9" "22uF" "CAPACITOR 2012(0805)" 58.5,82.5 r270 top
"C Backup-10" "22uF" "CAPACITOR 2012(0805)" 57,82.5 r270 top
"C Backup-11" "22uF" "CAPACITOR 2012(0805)" 56,38 r90 bottom
"C Backup-12" "22uF" "CAPACITOR 2012(0805)" 56,38 r90 top
"C BUCK-0.85V-IN" "22uF" "CAPACITOR 2012(0805)" -5,-11.5 r90 top
"C BUCK-0.85V-OUT1" "47uF" "CAPACITOR 2012(0805)" -5,-8.25 r90 top
"C BUCK-1.8V-IN" "22uF" "CAPACITOR 2012(0805)" 1,-11.5 r90 top
"C BUCK-1.8V-OUT1" "47uF" "CAPACITOR 2012(0805)" 1,-8.25 r90 top
"C CAP_SOC VDDS5" "1uF" "CAPACITOR 1005(0402)" -2,2.5 r90 bottom
"C EthernetPHY1-1" "22uF" "Capacitor 2012(0805)" 71.072,8.296 r90 top
"C EthernetPHY1-2" "22uF" "Capacitor 2012(0805)" 69.622,8.296 r90 top
"C EthernetPHY2-1" "22uF" "Capacitor 2012(0805)" 72.522,8.296 r90 top
"C EthernetPHY2-2" "22uF" "Capacitor 2012(0805)" 75.422,8.296 r90 top
"C EthernetPHY Earth" "0.1uF" "Capacitor 2012(0805)" 73.972,8.296 r90 top
"C LDO 3.3V-1-IN" "0.1uF" "CAPACITOR 2012(0805)" 14.125,40.4 r0 top
"C LDO 3.3V-1-OUT" "0.1uF" "Capacitor 2012(0805)" 73.5,36.5 r90 top
"C LDO 3.3V-2-IN" "0.1uF" "Capacitor 2012(0805)" 68.172,8.296 r90 top
"C LDO 3.3V-2-OUT" "0.1uF" "Capacitor 2012(0805)" 62.372,8.296 r90 top
"C MMC-1" "0.1uF" "CAPACITOR 2012(0805)" 15,50.5 r180 top
"C RJ451 RD1" "1uF" "Capacitor 2012(0805)" 65.272,8.296 r90 top
"C RJ451 TD1" "1uF" "Capacitor 2012(0805)" 76.872,8.296 r90 top
"C RJ452 RD1" "1uF" "Capacitor 2012(0805)" 87.022,8.296 r90 top
"C RJ452 TD1" "1uF" "Capacitor 2012(0805)" 85.572,8.296 r90 top
"Connector 1.8V Aux-1" "Connector BergStrip" "BergStrip 2.00mm" 4,19 r90 bottom
"Connector 1.8V Aux-2" "Connector BergStrip" "BergStrip 2.00mm" 4,21 r90 bottom
"Connector 5V-1" "Connector BergStrip" "BergStrip 2.00mm" 30,-25 r0 bottom
"Connector 5V-2" "Connector BergStrip" "BergStrip 2.00mm" 30,-23 r270 bottom
"Connector 5V-3" "Connector BergStrip" "BergStrip 2.00mm" 30,-21 r270 bottom
"Connector 5V-4" "Connector BergStrip" "BergStrip 2.00mm" 30,-19 r270 bottom
"Connector GND1" "Connector BergStrip" "BergStrip 2.00mm" -18,21 r90 bottom
"Connector GND2" "Connector BergStrip" "BergStrip 2.00mm" -18,25 r90 bottom
"Connector GND3" "Connector BergStrip" "BergStrip 2.00mm" -12,21 r90 bottom
"Connector GND4" "Connector BergStrip" "BergStrip 2.00mm" -12,25 r90 bottom
"Connector GND5" "Connector BergStrip" "BergStrip 2.00mm" -6,21 r90 bottom
"Connector GND6" "Connector BergStrip" "BergStrip 2.00mm" -6,25 r90 bottom
"Connector GND7" "Connector BergStrip" "BergStrip 2.00mm" 0,21 r90 bottom
"Connector GND8" "Connector BergStrip" "BergStrip 2.00mm" 0,25 r90 bottom
"Connector GND9" "Connector BergStrip" "BergStrip 2.00mm" 4,23 r90 bottom
"Connector GND11" "Connector BergStrip" "BergStrip 2.00mm" -18,-23 r270 bottom
"Connector GND12" "Connector BergStrip" "BergStrip 2.00mm" -18,-19 r270 bottom
"Connector GND13" "Connector BergStrip" "BergStrip 2.00mm" -12,-23 r270 bottom
"Connector GND14" "Connector BergStrip" "BergStrip 2.00mm" -12,-19 r270 bottom
"Connector GND15" "Connector BergStrip" "BergStrip 2.00mm" -6,-23 r270 bottom
"Connector GND16" "Connector BergStrip" "BergStrip 2.00mm" -6,-19 r270 bottom
"Connector GND17" "Connector BergStrip" "BergStrip 2.00mm" 0,-23 r270 bottom
"Connector GND18" "Connector BergStrip" "BergStrip 2.00mm" 0,-19 r270 bottom
"Connector GND19" "Connector BergStrip" "BergStrip 2.00mm" 6,-23 r270 bottom
"Connector GND20" "Connector BergStrip" "BergStrip 2.00mm" 6,-19 r270 bottom
"Connector I2C0 SCL" "Connector BergStrip" "BergStrip 2.00mm" 6,23 r180 bottom
"Connector I2C0 SDA" "Connector BergStrip" "BergStrip 2.00mm" 6,25 r180 bottom
"Connector I2C1 SCL" "Connector BergStrip" "BergStrip 2.00mm" 6,19 r180 bottom
"Connector I2C1 SDA" "Connector BergStrip" "BergStrip 2.00mm" 6,21 r180 bottom
"Connector I2C2 SDA" "Connector BergStrip" "BergStrip 2.00mm" 4,25 r270 bottom
"Connector IGBT UH" "Connector BergStrip" "BergStrip 2.00mm" 4,-25 r180 bottom
"Connector IGBT UL" "Connector BergStrip" "BergStrip 2.00mm" 6,-25 r180 bottom
"Connector IGBT VH" "Connector BergStrip" "BergStrip 2.00mm" 4,-23 r180 bottom
"Connector IGBT VL" "Connector BergStrip" "BergStrip 2.00mm" 6,-21 r180 bottom
"Connector IGBT WH" "Connector BergStrip" "BergStrip 2.00mm" 4,-21 r180 bottom
"Connector IGBT WL" "Connector BergStrip" "BergStrip 2.00mm" 4,-19 r180 bottom
"Connector JTAG 5V" "Connector BergStrip" "BERGSTRIP 2.54MM" -19.525,-6.435 r90 top
"Connector JTAG GND-1" "Connector BergStrip" "BERGSTRIP 2.54MM" -16.985,-14.055 r270 top
"Connector JTAG GND-2" "Connector BergStrip" "BERGSTRIP 2.54MM" -16.985,-8.975 r90 top
"Connector JTAG RST" "Connector BergStrip" "BERGSTRIP 2.54MM" -19.525,-14.055 r270 top
"Connector JTAG TCK" "Connector BergStrip" "BERGSTRIP 2.54MM" -16.985,-11.515 r270 top
"Connector JTAG TDI" "Connector BergStrip" "BERGSTRIP 2.54MM" -16.985,-6.435 r270 top
"Connector JTAG TDO" "Connector BergStrip" "BERGSTRIP 2.54MM" -16.985,-16.595 r270 top
"Connector JTAG TMS" "Connector BergStrip" "BERGSTRIP 2.54MM" -19.525,-16.595 r270 top
"Connector JTAG TX" "Connector BergStrip" "BERGSTRIP 2.54MM" -19.525,-8.975 r90 top
"Connector JTAG UART RX" "Connector BergStrip" "BERGSTRIP 2.54MM" -19.525,-11.515 r90 top
"Connector MCAN RX" "Connector BergStrip" "BergStrip 2.00mm" -8,-25 r270 bottom
"Connector MCAN TX" "Connector BergStrip" "BergStrip 2.00mm" -8,-23 r270 bottom
"Connector MCU I2C SCL" "Connector BergStrip" "BergStrip 2.00mm" 0,-25 r270 bottom
"Connector MCU I2C SDA" "Connector BergStrip" "BergStrip 2.00mm" 0,-21 r270 bottom
"Connector MCU MCAN0 RX" "Connector BergStrip" "BergStrip 2.00mm" 2,-25 r270 bottom
"Connector MCU MCAN0 TX" "Connector BergStrip" "BergStrip 2.00mm" 2,-23 r270 bottom
"Connector MCU MCAN1 RX" "Connector BergStrip" "BergStrip 2.00mm" 2,-21 r270 bottom
"Connector MCU MCAN1 TX" "Connector BergStrip" "BergStrip 2.00mm" 2,-19 r270 bottom
"Connector MCU RESETSTATZ" "Connector BergStrip" "BergStrip 2.00mm" 18,-19 r270 bottom
"Connector MCU SPI CLK" "Connector BergStrip" "BergStrip 2.00mm" 8,-19 r270 bottom
"Connector MCU SPI CS0" "Connector BergStrip" "BergStrip 2.00mm" 14,-19 r270 bottom
"Connector MCU SPI CS1" "Connector BergStrip" "BergStrip 2.00mm" 16,-19 r270 bottom
"Connector MCU SPI D0" "Connector BergStrip" "BergStrip 2.00mm" 10,-19 r270 bottom
"Connector MCU SPI D1" "Connector BergStrip" "BergStrip 2.00mm" 12,-19 r270 bottom
"Connector MCU UART CTS" "Connector BergStrip" "BergStrip 2.00mm" -2,-19 r270 bottom
"Connector MCU UART RTS" "Connector BergStrip" "BergStrip 2.00mm" -2,-21 r270 bottom
"Connector MCU UART RX" "Connector BergStrip" "BergStrip 2.00mm" -2,-25 r270 bottom
"Connector MCU UART TX" "Connector BergStrip" "BergStrip 2.00mm" -2,-23 r270 bottom
"Connector MicroSD" "Connector MicroSD" "MICROSD SAMESKY MSD-11-A" -14.5,3 r90 top
"Connector PRU0_GPIO0" "Connector BergStrip" "BergStrip 2.00mm" 2,19 r90 bottom
"Connector PRU0_GPIO1" "Connector BergStrip" "BergStrip 2.00mm" 0,19 r90 bottom
"Connector PRU0_GPIO2" "Connector BergStrip" "BergStrip 2.00mm" -2,19 r90 bottom
"Connector PRU0_GPIO3" "Connector BergStrip" "BergStrip 2.00mm" -4,19 r90 bottom
"Connector PRU0_GPIO4" "Connector BergStrip" "BergStrip 2.00mm" -6,19 r90 bottom
"Connector PRU0_GPIO5" "Connector BergStrip" "BergStrip 2.00mm" -8,19 r90 bottom
"Connector PRU0_GPIO6" "Connector BergStrip" "BergStrip 2.00mm" 2,21 r90 bottom
"Connector PRU0_GPIO7" "Connector BergStrip" "BergStrip 2.00mm" -2,21 r90 bottom
"Connector PRU0_GPIO8" "Connector BergStrip" "BergStrip 2.00mm" -4,21 r90 bottom
"Connector PRU0_GPIO9" "Connector BergStrip" "BergStrip 2.00mm" -8,21 r90 bottom
"Connector PRU0_GPIO10" "Connector BergStrip" "BergStrip 2.00mm" 2,23 r90 bottom
"Connector PRU0_GPIO11" "Connector BergStrip" "BergStrip 2.00mm" 0,23 r90 bottom
"Connector PRU0_GPIO12" "Connector BergStrip" "BergStrip 2.00mm" -2,23 r90 bottom
"Connector PRU0_GPIO13" "Connector BergStrip" "BergStrip 2.00mm" -4,23 r90 bottom
"Connector PRU0_GPIO14" "Connector BergStrip" "BergStrip 2.00mm" -6,23 r90 bottom
"Connector PRU0_GPIO15" "Connector BergStrip" "BergStrip 2.00mm" -8,23 r90 bottom
"Connector PRU0_GPIO16" "Connector BergStrip" "BergStrip 2.00mm" 2,25 r90 bottom
"Connector PRU0_GPIO17" "Connector BergStrip" "BergStrip 2.00mm" -2,25 r90 bottom
"Connector PRU0_GPIO18" "Connector BergStrip" "BergStrip 2.00mm" -4,25 r90 bottom
"Connector PRU0_GPIO19" "Connector BergStrip" "BergStrip 2.00mm" -8,25 r270 bottom
"Connector PRU1_GPIO0" "Connector BergStrip" "BergStrip 2.00mm" -10,19 r180 bottom
"Connector PRU1_GPIO1" "Connector BergStrip" "BergStrip 2.00mm" -12,19 r180 bottom
"Connector PRU1_GPIO2" "Connector BergStrip" "BergStrip 2.00mm" -14,19 r180 bottom
"Connector PRU1_GPIO3" "Connector BergStrip" "BergStrip 2.00mm" -16,19 r180 bottom
"Connector PRU1_GPIO4" "Connector BergStrip" "BergStrip 2.00mm" -18,19 r90 bottom
"Connector PRU1_GPIO5" "Connector BergStrip" "BergStrip 2.00mm" -20,19 r90 bottom
"Connector PRU1_GPIO6" "Connector BergStrip" "BergStrip 2.00mm" -10,21 r90 bottom
"Connector PRU1_GPIO7" "Connector BergStrip" "BergStrip 2.00mm" -14,21 r90 bottom
"Connector PRU1_GPIO8" "Connector BergStrip" "BergStrip 2.00mm" -16,21 r90 bottom
"Connector PRU1_GPIO9" "Connector BergStrip" "BergStrip 2.00mm" -20,21 r90 bottom
"Connector PRU1_GPIO10" "Connector BergStrip" "BergStrip 2.00mm" -10,23 r90 bottom
"Connector PRU1_GPIO11" "Connector BergStrip" "BergStrip 2.00mm" -12,23 r90 bottom
"Connector PRU1_GPIO12" "Connector BergStrip" "BergStrip 2.00mm" -14,23 r90 bottom
"Connector PRU1_GPIO13" "Connector BergStrip" "BergStrip 2.00mm" -16,23 r90 bottom
"Connector PRU1_GPIO14" "Connector BergStrip" "BergStrip 2.00mm" -18,23 r90 bottom
"Connector PRU1_GPIO15" "Connector BergStrip" "BergStrip 2.00mm" -20,23 r90 bottom
"Connector PRU1_GPIO16" "Connector BergStrip" "BergStrip 2.00mm" -10,25 r90 bottom
"Connector PRU1_GPIO17" "Connector BergStrip" "BergStrip 2.00mm" -14,25 r90 bottom
"Connector PRU1_GPIO18" "Connector BergStrip" "BergStrip 2.00mm" -16,25 r90 bottom
"Connector PRU1_GPIO19" "Connector BergStrip" "BergStrip 2.00mm" -20,25 r90 bottom
"Connector R5F CLOCKOUT" "Connector BergStrip" "BergStrip 2.00mm" -4,-19 r270 bottom
"Connector R5F I2C SCL" "Connector BergStrip" "BergStrip 2.00mm" -8,-21 r270 bottom
"Connector R5F I2C SDA" "Connector BergStrip" "BergStrip 2.00mm" -8,-19 r270 bottom
"Connector R5F UART CTS" "Connector BergStrip" "BergStrip 2.00mm" -10,-19 r270 bottom
"Connector R5F UART RTS" "Connector BergStrip" "BergStrip 2.00mm" -10,-21 r270 bottom
"Connector R5F UART RX" "Connector BergStrip" "BergStrip 2.00mm" -10,-25 r270 bottom
"Connector R5F UART TX" "Connector BergStrip" "BergStrip 2.00mm" -10,-23 r270 bottom
"Connector RJ451" "Connector HR911105A" "RJ45 HR911105A" 25,-9 r270 top
"Connector RJ452" "Connector HR911105A" "RJ45 HR911105A" 25,9 r270 top
"Connector SPI CS0" "Connector BergStrip" "BergStrip 2.00mm" -4,-21 r270 bottom
"Connector SPI CS1" "Connector BergStrip" "BergStrip 2.00mm" -6,-21 r270 bottom
"Connector SPI D0" "Connector BergStrip" "BergStrip 2.00mm" -4,-25 r270 bottom
"Connector SPI D1" "Connector BergStrip" "BergStrip 2.00mm" -4,-23 r270 bottom
"Connector SPL CLK" "Connector BergStrip" "BergStrip 2.00mm" -6,-25 r270 bottom
"Connector UART0 FL" "Connector BergStrip" "BergStrip 2.00mm" -20,-23 r90 bottom
"Connector UART0 RX" "Connector BergStrip" "BergStrip 2.00mm" -20,-25 r90 bottom
"Connector UART0 TX" "Connector BergStrip" "BergStrip 2.00mm" -18,-25 r90 bottom
"Connector UART1 FL" "Connector BergStrip" "BergStrip 2.00mm" -20,-19 r90 bottom
"Connector UART1 RX" "Connector BergStrip" "BergStrip 2.00mm" -20,-21 r90 bottom
"Connector UART1 TX" "Connector BergStrip" "BergStrip 2.00mm" -18,-21 r90 bottom
"Connector UART2 RX" "Connector BergStrip" "BergStrip 2.00mm" -16,-25 r180 bottom
"Connector UART2 TX" "Connector BergStrip" "BergStrip 2.00mm" -14,-25 r180 bottom
"Connector UART3 RX" "Connector BergStrip" "BergStrip 2.00mm" -16,-23 r180 bottom
"Connector UART3 TX" "Connector BergStrip" "BergStrip 2.00mm" -14,-23 r180 bottom
"Connector UART4 RX" "Connector BergStrip" "BergStrip 2.00mm" -16,-21 r180 bottom
"Connector UART4 TX" "Connector BergStrip" "BergStrip 2.00mm" -14,-21 r180 bottom
"Connector UART5 RX" "Connector BergStrip" "BergStrip 2.00mm" -16,-19 r180 bottom
"Connector UART5 TX" "Connector BergStrip" "BergStrip 2.00mm" -14,-19 r180 bottom
"Connector UART6 RX" "Connector BergStrip" "BergStrip 2.00mm" -12,-25 r180 bottom
"Connector UART6 TX" "Connector BergStrip" "BergStrip 2.00mm" -12,-21 r180 bottom
CPU "CPU AM6254" AM6254 0,0 r90 top locked
EthernetPHY2 "EthernetPHY DP83825IR" DP83825IRMQR 11,3 r90 top
"EthernetPHY 1" "EthernetPHY DP83825IR" DP83825IRMQR 11,-3 r90 top
"L Buck 0.85V" "1uH 3.1A" "INDUCTOR 2016(0806)" -3,-8.25 r90 top
"L Buck 1.8V" "1uH 3.1A" "INDUCTOR 2016(0806)" 3,-8.25 r90 top
"LDO 3.3V-1" "TLV743xxPDBV" TLV743XXPDBV -12.5,12.5 r270 top
"LDO 3.3V-2" "TLV743xxPDBV" TLV743xxPDBV 60.197,8.097 r90 top
LED0 "Red" "LED 2012(0805)" 37,72.75 r90 top
LED1 "Red" "LED 2012(0805)" 38.5,72.75 r90 top
LED2 "Red" "LED 2012(0805)" 40,72.75 r90 top
LED3 "Red" "LED 2012(0805)" 41.5,72.75 r90 top
"LED 0.85V" "Red" "LED 2012(0805)" 77.5,36.5 r90 top
"LED 1.8V" "Red" "LED 2012(0805)" 75.5,36.5 r90 top
"LED 3.3V-1" "Red" "LED 2012(0805)" 16.5,85.5 r270 top
"LED 3.3V-2" "Red" "LED 2012(0805)" 89.922,8.296 r90 top
"LED 5V" "Red" "LED 2012(0805)" 66.5,85.5 r270 top
"LED IGBT UH" "Red" "LED 2012(0805)" 44.5,72.75 r270 top
"LED IGBT UL" "Red" "LED 2012(0805)" 43,72.75 r270 top
"LED IGBT VH" "Red" "LED 2012(0805)" 47.5,72.75 r270 top
"LED IGBT VL" "Red" "LED 2012(0805)" 46,72.75 r270 top
"LED IGBT WH" "Red" "LED 2012(0805)" 50.5,72.75 r270 top
"LED IGBT WL" "Red" "LED 2012(0805)" 49,72.75 r270 top
"MDIO Pullup" "1.5K" "RESISTOR 2012(0805)" 26.5,67.75 r90 top
"MMC SDCD Pulldown" "1.5K" "RESISTOR 1005(0402)" 92.995,67.895 r0 top
"R BootStrap Down 3" "100K" "RESISTOR 1005(0402)" 83,65.75 r225 top
"R BootStrap Down 4" "100K" "RESISTOR 1005(0402)" 83,67.25 r180 top
"R BootStrap Down 5" "100K" "RESISTOR 1005(0402)" 84.75,67 r135 top
"R BootStrap Down 7" "100K" "RESISTOR 1005(0402)" 87,64.5 r90 top
"R BootStrap Down 8" "100K" "RESISTOR 1005(0402)" 92.995,61.545 r45 top
"R BootStrap Down 10" "100K" "RESISTOR 1005(0402)" 91.725,61.545 r90 top
"R BootStrap Down 11" "100K" "RESISTOR 1005(0402)" 91.725,66.625 r270 top
"R BootStrap Down 12" "100K" "RESISTOR 1005(0402)" 90.455,61.545 r135 top
"R BootStrap Down 13" "100K" "RESISTOR 1005(0402)" 90.455,66.625 r225 top
"R BootStrap Down 14" "100K" "RESISTOR 1005(0402)" 86.645,61.545 r90 top
"R BootStrap Down 15" "100K" "RESISTOR 1005(0402)" 86.645,66.625 r270 top
"R BootStrap Up 0" "1.1K" "RESISTOR 1005(0402)" 82.5,63.5 r270 top
"R BootStrap Up 1" "1.1K" "RESISTOR 1005(0402)" 84,64.5 r315 top
"R BootStrap Up 2" "100K" "RESISTOR 1005(0402)" 85,65.25 r315 top
"R BootStrap Up 6" "1.1K" "RESISTOR 1005(0402)" 85.75,63.75 r225 top
"R BootStrap Up 9" "1.1K" "RESISTOR 1005(0402)" 93.313,64.72 r225 top
"R BUCK-0.85V Divider-H" "4.53K" "RESISTOR 2012(0805)" -1,-8.25 r90 top
"R BUCK-0.85V Divider-L" "1K" "RESISTOR 2012(0805)" -1,-11.5 r90 top
"R BUCK-0.85V PG" "1K" "RESISTOR 2012(0805)" 0,-14 r0 top
"R BUCK-1.8V Divider-H" "4.53K" "RESISTOR 2012(0805)" 5,-8.25 r90 top
"R BUCK-1.8V Divider-L" "1K" "RESISTOR 2012(0805)" 5,-11.5 r90 top
"R BUCK-1.8V PG" "1K" "RESISTOR 2012(0805)" 4.25,-14 r0 top
"R EthernetPHY1 LED Act" "6.49K 1%" "Resistor 2012(0805)" 79.772,8.296 r90 top
"R EthernetPHY1 LED USER" "6.49K 1%" "Resistor 2012(0805)" 78.322,8.296 r90 top
"R EthernetPHY2 LED Act" "6.49K 1%" "Resistor 2012(0805)" 81.222,8.296 r90 top
"R EthernetPHY2 LED USER" "6.49K 1%" "Resistor 2012(0805)" 84.122,8.296 r90 top
"R EthernetPHY Earth" "6.49K 1%" "Resistor 2012(0805)" 82.672,8.296 r90 top
"R JTAG Pulldown RST" "4.7K" "RESISTOR 1005(0402)" 38.5,40.95 r270 top
"R JTAG TDO" "22E" "RESISTOR 2012(0805)" 35.5,39.5 r180 top
"R LED0" "150E" "RESISTOR 2012(0805)" 37,68.75 r90 top
"R LED1" "150E" "RESISTOR 2012(0805)" 38.5,68.75 r90 top
"R LED2" "150E" "RESISTOR 2012(0805)" 40,68.75 r90 top
"R LED3" "150E" "RESISTOR 2012(0805)" 41.5,68.75 r90 top
"R LED 0.85V" "150E" "Resistor 2012(0805)" 71.5,36.5 r90 top
"R LED 1.8V" "150E" "Resistor 2012(0805)" 69.5,36.5 r90 top
"R LED 3.3V-1" "150E" "RESISTOR 2012(0805)" 16.5,82.5 r90 top
"R LED 3.3V-2" "150E" "Resistor 2012(0805)" 91.372,8.296 r90 top
"R LED 5V" "150E" "RESISTOR 2012(0805)" 65,85.5 r270 top
"R LED IGBT UH" "150E" "RESISTOR 2012(0805)" 44.5,68.75 r270 top
"R LED IGBT UL" "150E" "RESISTOR 2012(0805)" 43,68.75 r270 top
"R LED IGBT VH" "150E" "RESISTOR 2012(0805)" 47.5,68.75 r270 top
"R LED IGBT VL" "150E" "RESISTOR 2012(0805)" 46,68.75 r270 top
"R LED IGBT WH" "150E" "RESISTOR 2012(0805)" 50.5,68.75 r270 top
"R LED IGBT WL" "150E" "RESISTOR 2012(0805)" 49,68.75 r270 top
"R MCU_PORZ" "10K" "RESISTOR 2012(0805)" -4,-14 r180 top
"R MMC PULLUP CMD" "10K" "RESISTOR 2012(0805)" -25.375,13.25 r180 top
"R MMC PULLUP D0" "10K" "RESISTOR 2012(0805)" -25.375,11.75 r180 top
"R MMC PULLUP D1" "10K" "RESISTOR 2012(0805)" -25.375,10.25 r180 top
"R MMC PULLUP D2" "10K" "RESISTOR 2012(0805)" -25.375,16.25 r180 top
"R MMC PULLUP D3" "10K" "RESISTOR 2012(0805)" -25.375,14.75 r180 top
"R RBIAS EthernetPHY1" "6.49K 1%" "Resistor 2012(0805)" 66.722,8.296 r90 top
"R RBIAS EthernetPHY2" "6.49K 1%" "Resistor 2012(0805)" 63.822,8.296 r90 top
"RMII2 Strap Address 1" "2.49K" "Resistor 2012(0805)" 88.472,8.296 r90 top
"X 25Mz AM62x" "Crystal CMOS" CDC6CE025000ADLER -8,-9.5 r90 top

## Footprints (in the part's own frame and the unit in brackets; to place one, negate y for a bottom-side part, rotate by r counter-clockwise, add the part's x,y. Pads: shape width x height; smd on the part's side, far side on the other; paste and mask are expansions set on the pad)
AM6254 [mm]
  round 0.25 smd: A1(-6,6) A2(-5.5,6) A3(-5,6) A4(-4.5,6) A5(-4,6) A6(-3.5,6) A7(-3,6) A8(-2.5,6) A9(-2,6) A10(-1.5,6) A11(-1,6) A12(-0.5,6) A13(0,6) A14(0.5,6) A15(1,6) A16(1.5,6) A17(2,6) A18(2.5,6) A19(3,6) A20(3.5,6) A21(4,6) A22(4.5,6) A23(5,6) A24(5.5,6) A25(6,6) AA1(-6,-4) AA2(-5.5,-4) AA3(-5,-4) AA5(-4,-4) AA7(-3,-4) AA8(-2.5,-4) AA11(-1,-4) AA12(-0.5,-4) AA14(0.5,-4) AA15(1,-4) AA18(2.5,-4) AA19(3,-4) AA21(4,-4) AA23(5,-4) AA24(5.5,-4) AA25(6,-4) AB1(-6,-4.5) AB2(-5.5,-4.5) AB4(-4.5,-4.5) AB6(-3.5,-4.5) AB9(-2,-4.5) AB10(-1.5,-4.5) AB12(-0.5,-4.5) AB14(0.5,-4.5) AB16(1.5,-4.5) AB17(2,-4.5) AB20(3.5,-4.5) AB22(4.5,-4.5) AB24(5.5,-4.5) AB25(6,-4.5) AC1(-6,-5) AC2(-5.5,-5) AC5(-4,-5) AC6(-3.5,-5) AC9(-2,-5) AC11(-1,-5) AC13(0,-5) AC15(1,-5) AC17(2,-5) AC20(3.5,-5) AC21(4,-5) AC24(5.5,-5) AC25(6,-5) AD1(-6,-5.5) AD2(-5.5,-5.5) AD3(-5,-5.5) AD4(-4.5,-5.5) AD5(-4,-5.5) AD6(-3.5,-5.5) AD7(-3,-5.5) AD8(-2.5,-5.5) AD9(-2,-5.5) AD10(-1.5,-5.5) AD11(-1,-5.5) AD12(-0.5,-5.5) AD13(0,-5.5) AD14(0.5,-5.5) AD15(1,-5.5) AD16(1.5,-5.5) AD17(2,-5.5) AD18(2.5,-5.5) AD19(3,-5.5) AD20(3.5,-5.5) AD21(4,-5.5) AD22(4.5,-5.5) AD23(5,-5.5) AD24(5.5,-5.5) AD25(6,-5.5) AE1(-6,-6) AE2(-5.5,-6) AE3(-5,-6) AE4(-4.5,-6) AE5(-4,-6) AE6(-3.5,-6) AE7(-3,-6) AE8(-2.5,-6) AE9(-2,-6) AE10(-1.5,-6) AE11(-1,-6) AE12(-0.5,-6) AE13(0,-6) AE14(0.5,-6) AE15(1,-6) AE16(1.5,-6) AE17(2,-6) AE18(2.5,-6) AE19(3,-6) AE20(3.5,-6) AE21(4,-6) AE22(4.5,-6) AE23(5,-6) AE24(5.5,-6) AE25(6,-6) B1(-6,5.5) B2(-5.5,5.5) B3(-5,5.5) B4(-4.5,5.5) B5(-4,5.5) B6(-3.5,5.5) B7(-3,5.5) B8(-2.5,5.5) B9(-2,5.5) B10(-1.5,5.5) B11(-1,5.5) B12(-0.5,5.5) B13(0,5.5) B14(0.5,5.5) B15(1,5.5) B16(1.5,5.5) B17(2,5.5) B18(2.5,5.5) B19(3,5.5) B20(3.5,5.5) B21(4,5.5) B22(4.5,5.5) B23(5,5.5) B24(5.5,5.5) B25(6,5.5) C1(-6,5) C2(-5.5,5) C5(-4,5) C6(-3.5,5) C9(-2,5) C11(-1,5) C13(0,5) C15(1,5) C17(2,5) C20(3.5,5) C21(4,5) C24(5.5,5) C25(6,5) D1(-6,4.5) D2(-5.5,4.5) D4(-4.5,4.5) D6(-3.5,4.5) D9(-2,4.5) D10(-1.5,4.5) D12(-0.5,4.5) D14(0.5,4.5) D16(1.5,4.5) D17(2,4.5) D20(3.5,4.5) D22(4.5,4.5) D24(5.5,4.5) D25(6,4.5) E1(-6,4) E2(-5.5,4) E3(-5,4) E5(-4,4) E7(-3,4) E8(-2.5,4) E11(-1,4) E12(-0.5,4) E14(0.5,4) E15(1,4) E18(2.5,4) E19(3,4) E21(4,4) E23(5,4) E24(5.5,4) E25(6,4) F1(-6,3.5) F2(-5.5,3.5) F3(-5,3.5) F4(-4.5,3.5) F6(-3.5,3.5) F8(-2.5,3.5) F11(-1,3.5) F13(0,3.5) F15(1,3.5) F18(2.5,3.5) F20(3.5,3.5) F22(4.5,3.5) F23(5,3.5) F24(5.5,3.5) F25(6,3.5) G1(-6,3) G2(-5.5,3) G5(-4,3) G7(-3,3) G9(-2,3) G10(-1.5,3) G12(-0.5,3) G13(0,3) G14(0.5,3) G16(1.5,3) G17(2,3) G19(3,3) G21(4,3) G24(5.5,3) G25(6,3) H1(-6,2.5) H2(-5.5,2.5) H5(-4,2.5) H6(-3.5,2.5) H8(-2.5,2.5) H9(-2,2.5) H10(-1.5,2.5) H11(-1,2.5) H13(0,2.5) H15(1,2.5) H16(1.5,2.5) H17(2,2.5) H18(2.5,2.5) H20(3.5,2.5) H21(4,2.5) H24(5.5,2.5) H25(6,2.5) J1(-6,2) J2(-5.5,2) J3(-5,2) J4(-4.5,2) J7(-3,2) J8(-2.5,2) J11(-1,2) J12(-0.5,2) J13(0,2) J14(0.5,2) J18(2.5,2) J19(3,2) J22(4.5,2) J23(5,2) J24(5.5,2) J25(6,2) K1(-6,1.5) K2(-5.5,1.5) K3(-5,1.5) K4(-4.5,1.5) K7(-3,1.5) K9(-2,1.5) K10(-1.5,1.5) K13(0,1.5) K15(1,1.5) K16(1.5,1.5) K17(2,1.5) K18(2.5,1.5) K19(3,1.5) K22(4.5,1.5) K24(5.5,1.5) K25(6,1.5) L1(-6,1) L2(-5.5,1) L5(-4,1) L6(-3.5,1) L8(-2.5,1) L11(-1,1) L12(-0.5,1) L14(0.5,1) L15(1,1) L18(2.5,1) L20(3.5,1) L21(4,1) L23(5,1) L24(5.5,1) L25(6,1) M1(-6,0.5) M2(-5.5,0.5) M4(-4.5,0.5) M5(-4,0.5) M7(-3,0.5) M8(-2.5,0.5) M9(-2,0.5) M10(-1.5,0.5) M12(-0.5,0.5) M13(0,0.5) M16(1.5,0.5) M17(2,0.5) M18(2.5,0.5) M19(3,0.5) M21(4,0.5) M22(4.5,0.5) M24(5.5,0.5) M25(6,0.5) N1(-6,0) N2(-5.5,0) N3(-5,0) N6(-3.5,0) N8(-2.5,0) N11(-1,0) N12(-0.5,0) N13(0,0) N14(0.5,0) N15(1,0) N18(2.5,0) N20(3.5,0) N23(5,0) N24(5.5,0) N25(6,0) P1(-6,-0.5) P2(-5.5,-0.5) P4(-4.5,-0.5) P5(-4,-0.5) P7(-3,-0.5) P9(-2,-0.5) P10(-1.5,-0.5) P13(0,-0.5) P16(1.5,-0.5) P17(2,-0.5) P18(2.5,-0.5) P19(3,-0.5) P21(4,-0.5) P22(4.5,-0.5) P24(5.5,-0.5) P25(6,-0.5) R1(-6,-1) R2(-5.5,-1) R3(-5,-1) R5(-4,-1) R6(-3.5,-1) R8(-2.5,-1) R11(-1,-1) R12(-0.5,-1) R13(0,-1) R14(0.5,-1) R15(1,-1) R18(2.5,-1) R20(3.5,-1) R21(4,-1) R23(5,-1) R24(5.5,-1) R25(6,-1) T1(-6,-1.5) T2(-5.5,-1.5) T4(-4.5,-1.5) T7(-3,-1.5) T8(-2.5,-1.5) T9(-2,-1.5) T10(-1.5,-1.5) T13(0,-1.5) T14(0.5,-1.5) T16(1.5,-1.5) T17(2,-1.5) T18(2.5,-1.5) T19(3,-1.5) T22(4.5,-1.5) T24(5.5,-1.5) T25(6,-1.5) U1(-6,-2) U2(-5.5,-2) U3(-5,-2) U4(-4.5,-2) U7(-3,-2) U8(-2.5,-2) U11(-1,-2) U12(-0.5,-2) U14(0.5,-2) U15(1,-2) U18(2.5,-2) U19(3,-2) U22(4.5,-2) U23(5,-2) U24(5.5,-2) U25(6,-2) V1(-6,-2.5) V2(-5.5,-2.5) V5(-4,-2.5) V6(-3.5,-2.5) V8(-2.5,-2.5) V9(-2,-2.5) V10(-1.5,-2.5) V11(-1,-2.5) V13(0,-2.5) V15(1,-2.5) V16(1.5,-2.5) V17(2,-2.5) V18(2.5,-2.5) V20(3.5,-2.5) V21(4,-2.5) V24(5.5,-2.5) V25(6,-2.5) W1(-6,-3) W2(-5.5,-3) W5(-4,-3) W7(-3,-3) W9(-2,-3) W10(-1.5,-3) W12(-0.5,-3) W13(0,-3) W14(0.5,-3) W16(1.5,-3) W17(2,-3) W19(3,-3) W21(4,-3) W24(5.5,-3) W25(6,-3) Y1(-6,-3.5) Y2(-5.5,-3.5) Y3(-5,-3.5) Y4(-4.5,-3.5) Y6(-3.5,-3.5) Y8(-2.5,-3.5) Y11(-1,-3.5) Y13(0,-3.5) Y15(1,-3.5) Y18(2.5,-3.5) Y20(3.5,-3.5) Y22(4.5,-3.5) Y23(5,-3.5) Y24(5.5,-3.5) Y25(6,-3.5)
  silkscreen extent -6.4,-6.4 6.4,6.4, body extent -6.5,-6.5 6.5,6.5, height 0.89
"BergStrip 2.00mm" [mm]
  round 1.25 hole 0.8: 1(0,0)
  silkscreen extent -0.9,-0.9 0.9,0.9, body extent -1,-1 1,1, height 6.96
"BERGSTRIP 2.54MM" [mm]
  round 1.5 hole 1 paste-2539.97 mask+0.1: 1(0,0)
  silkscreen extent -1.17,-1.17 1.17,1.17, body extent -1.27,-1.27 1.27,1.27, height 8.6
"CAPACITOR 1005(0402)" [mm]
  rect 0.5x0.6 smd: 1(-0.45,0) 2(0.45,0)
  silkscreen extent 0,-0.2 0,0.2, body extent -0.5,-0.25 0.5,0.25, height 0.5
"CAPACITOR 2012(0805)" [mm]
  rect 0.9x1.4 smd: 1(-1,0) 2(1,0)
  silkscreen extent -0.4,-0.65 0.4,0.65, body extent -1,-0.63 1,0.63, height 0.82
"Capacitor 2012(0805)" [mm]
  rect 0.9x1.4 smd: 1(-1,0) 2(1,0)
  silkscreen extent -0.4,-0.65 0.4,0.65, body extent -1,-0.63 1,0.63, height 0.82
CDC6CE025000ADLER [mm] "Crystal Clock Generator 25Mhz"
  rrect50% 0.6x0.7 smd: 1(-0.8,1.05) 2(-0.8,-1.05) 3(0.8,-1.05) 4(0.8,1.05)
  silkscreen extent -1,0.4 -0.2,1.2, body extent -1.25,-1.6 1.25,1.6, height 0.9
DP83825IRMQR [mil]
  rect 18x8 smd: 1(-58.07,35.43) 2(-58.07,19.69) 4(-58.07,-19.69) 5(-58.07,-35.43) 13(58.07,-35.43) 14(58.07,-19.69) 16(58.07,19.69) 17(58.07,35.43)
  rect 18x16 smd: 3(-58.07,0) 15(58.07,0)
  rect 10x10 smd: 6(-52.17,-52.17) 12(52.17,-52.17) 18(52.17,52.17) 24(-52.17,52.17)
  rect 8x18 smd: 7(-35.43,-58.07) 8(-19.68,-58.07) 10(19.69,-58.07) 11(35.43,-58.07) 19(35.43,58.07) 20(19.69,58.07) 22(-19.68,58.07) 23(-35.43,58.07)
  rect 16x18 smd: 9(0,-58.07) 21(0,58.07)
  rect 74.8x74.8 smd: 25(0,0)
  silkscreen extent -67,47 -47,67, body extent -59,-59 59,59, height 31
"INDUCTOR 2016(0806)" [mm]
  rect 0.9x1.8 smd: 1(-1,0) 2(1,0)
  silkscreen extent -0.4,-0.65 0.4,0.65, body extent -1,-0.8 1,0.8, height 1
"LED 2012(0805)" [mm]
  rect 0.9x1.4 smd mask+0: 1(-1,0) 2(1,0)
  silkscreen extent -0.4,-0.65 0.4,0.65, body extent -1,-0.63 1,0.63, height 1.5
"MICROSD SAMESKY MSD-11-A" [mm]
  rect 0.6x1.5 smd: 1(-2.9,-3.05) 2(-1.8,-3.05) 3(-0.7,-3.05) 4(0.4,-3.05) 5(1.5,-3.05) 6(2.6,-3.05) 7(3.7,-3.05) 8(4.8,-3.05) 9(-5.25,-3.05) 10(-4,-3.05)
  rect 1.5x2.34 smd: SH(-7.17,4.7) SH(7.17,4.7)
  round 0.7 hole 1.4 unplated: ""(-5,0) ""(5,0)
  body extent -7.39,-3.52 7.39,16.3, height 1.85
"PUSHBUTTON TSB008A25" [mm]
  rect 1x1.2 smd: 1(-3.5,0) 2(3.5,0)
  silkscreen extent -2.88,-1.63 2.88,1.63, body extent -4,-1.75 4,1.75, height 2.5
"RESISTOR 1005(0402)" [mm]
  rect 0.5x0.6 smd: 1(-0.45,0) 2(0.45,0)
  silkscreen extent -0.03,0 0.03,0, body extent -0.5,-0.25 0.5,0.25, height 0.35
"RESISTOR 2012(0805)" [mm]
  rect 0.9x1.4 smd: 1(-1,0) 2(1,0)
  silkscreen extent -0.33,-0.65 0.33,0.65, body extent -1,-0.63 1,0.63, height 0.5
"Resistor 2012(0805)" [mm]
  rect 0.9x1.4 smd: 1(-1,0) 2(1,0)
  silkscreen extent -0.4,-0.65 0.4,0.65, body extent -1,-0.63 1,0.63, height 0.5
"RJ45 HR911105A" [mm]
  round 1.5 hole 0.89: 1(4.445,-6.35)
  round 1.5 hole 1.02: 2(3.175,-8.89) 3(1.905,-6.35) 4(0.635,-8.89) 5(-0.635,-6.35) 6(-1.905,-8.89) 7(-3.175,-6.35) 8(-4.445,-8.89) 9(6.625,4.9) 10(4.085,4.9) 11(-4.085,4.9) 12(-6.625,4.9)
  round 2.63 hole 1.63: SH(-7.745,-3.05) SH(7.745,-3.05)
  round 0 hole 3.25 unplated: ""(-5.715,0) ""(5.715,0)
  silkscreen extent -8.02,-10.4 8.02,5, body extent -8.02,-10.37 8.02,10.93, height 13.7
TLV743XXPDBV [mm]
  rect 1.01x0.458 smd paste+0 mask+0: 1(-1.144,0.95) 2(-1.144,0) 3(-1.144,-0.95) 4(1.144,-0.95) 5(1.144,0.95)
  body extent -1.4,-1.45 1.4,1.45, height 1.2
TLV743xxPDBV [mm]
  rect 1.01x0.458 smd paste+0 mask+0: 1(-1.144,0.95) 2(-1.144,0) 3(-1.144,-0.95) 4(1.144,-0.95) 5(1.144,0.95)
  body extent -1.4,-1.45 1.4,1.45, height 1.2
TPS62A03ADLR [mm]
  rect 0.67x0.3 smd paste+0 mask+0: 1(-0.74,0.5) 2(-0.74,0) 3(-0.74,-0.5) 4(0.74,-0.5) 5(0.74,0) 6(0.74,0.5)
  silkscreen extent -0.25,0.25 0,0.5, body extent -0.8,-0.78 0.8,0.78, height 0.6